# Allegro board dividers_v2.brd
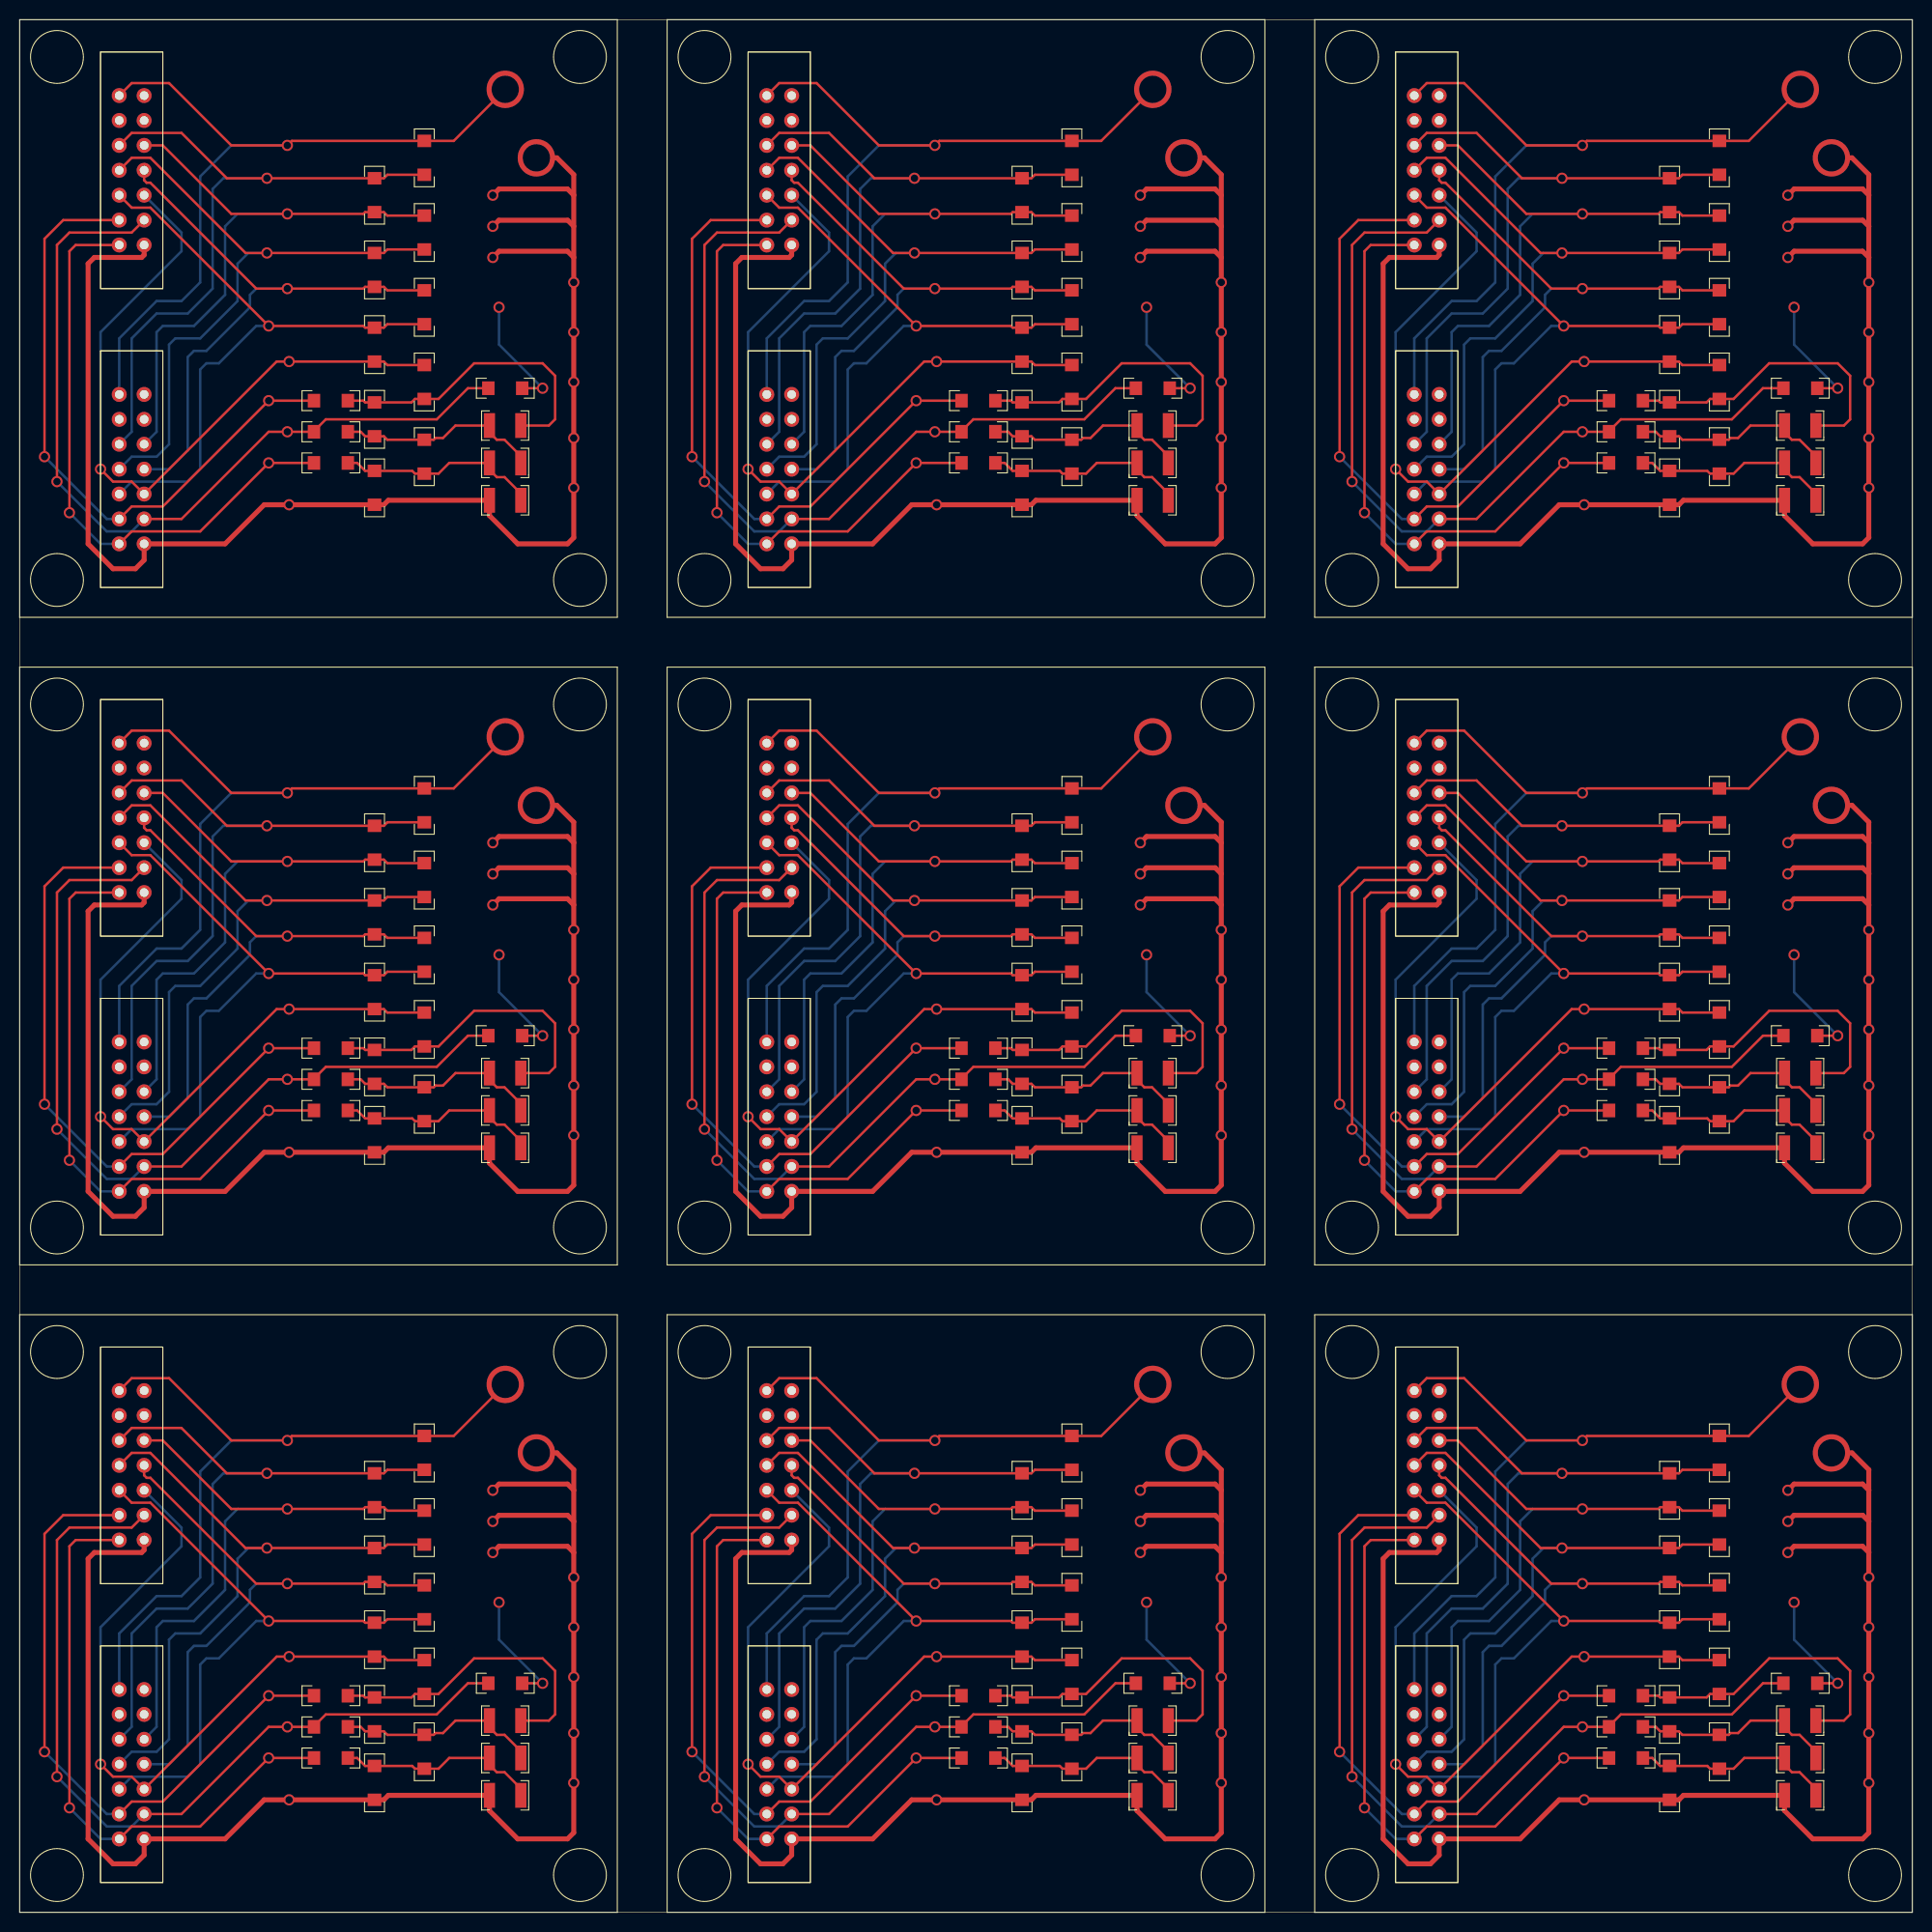
[diagram p0: board, top side]
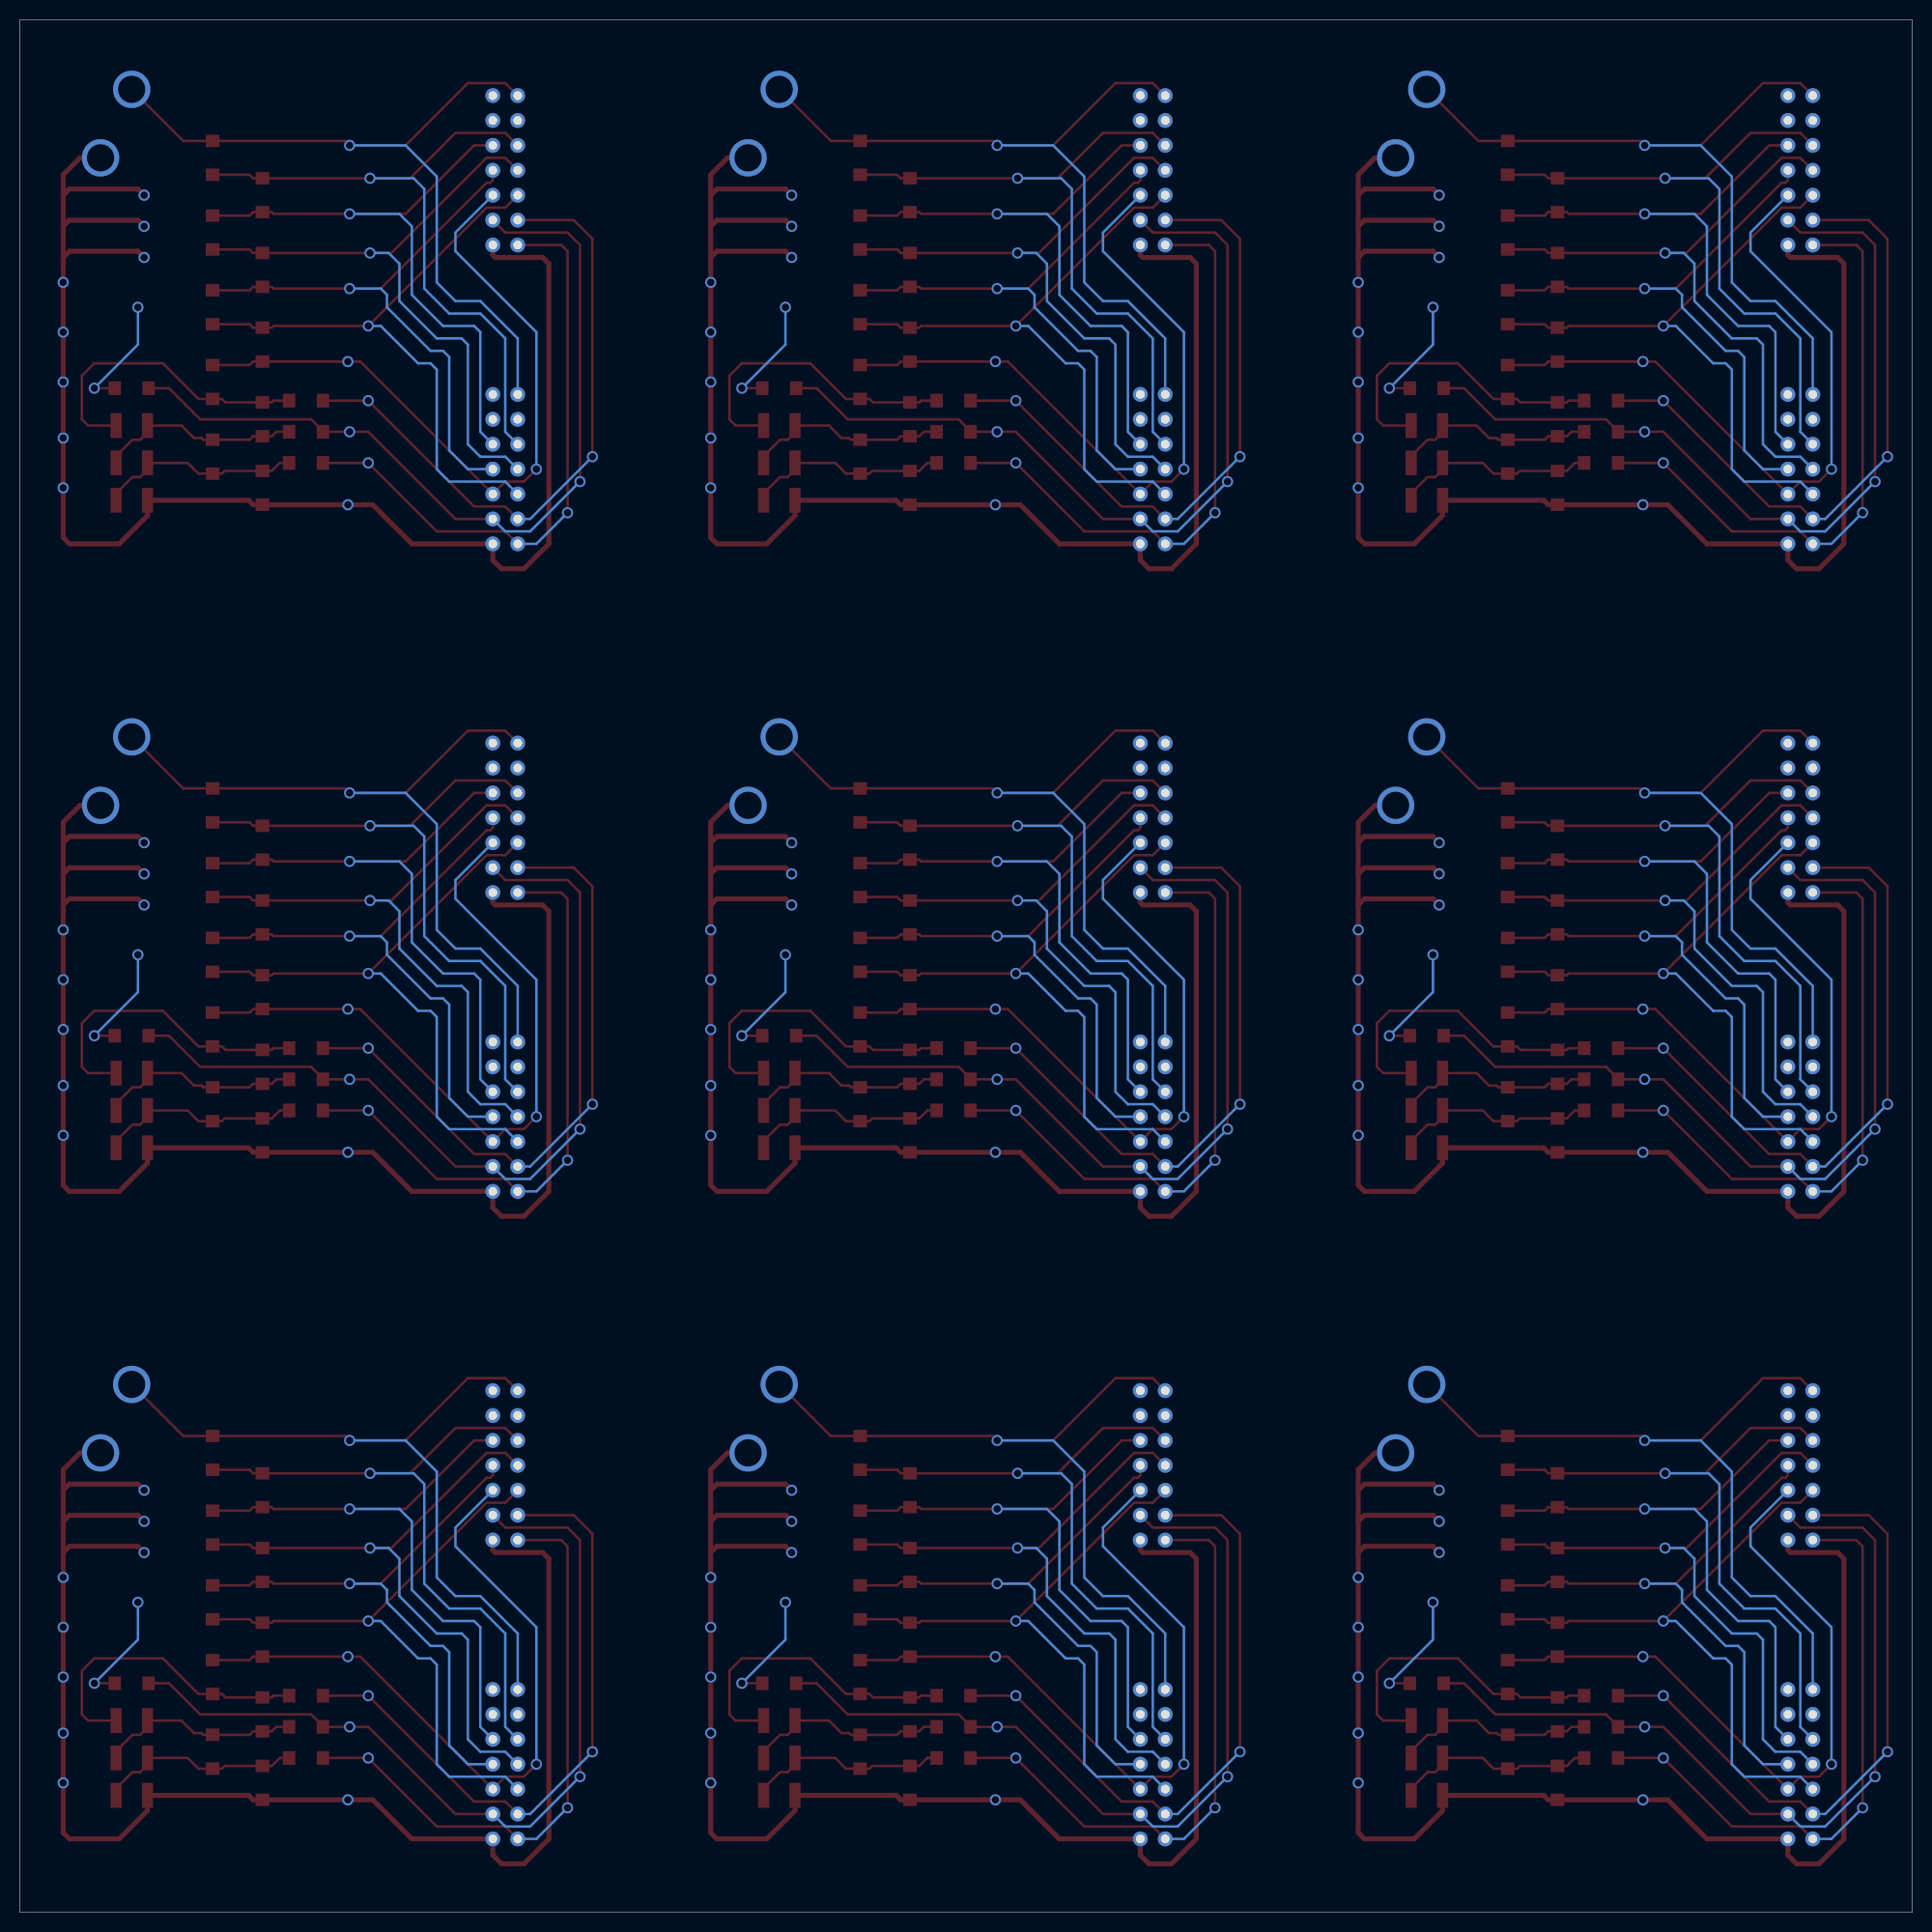
[diagram p1: board, bottom side, seen from below]

Outline 193.04 x 193.04 mm; copper layers: TOP, BOTTOM. Coordinates in mm from the lower left corner of the outline.
Outline path: 0,193.04 0,0 193.04,0 193.04,193.04 0,193.04

## Placement (name value [footprint] x y rotation side)
C1_1  0.022UF  [C1210]  49.53 19.56 180 top
C1_2  0.022UF  [C1210]  115.57 19.56 180 top
C1_3  0.022UF  [C1210]  181.61 19.56 180 top
C1_4  0.022UF  [C1210]  49.53 85.6 180 top
C1_5  0.022UF  [C1210]  115.57 85.6 180 top
C1_6  0.022UF  [C1210]  181.61 85.6 180 top
C1_7  0.022UF  [C1210]  49.53 151.64 180 top
C1_8  0.022UF  [C1210]  115.57 151.64 180 top
C1_9  0.022UF  [C1210]  181.61 151.64 180 top
C2_1  0.022UF  [C1210]  49.53 15.75 180 top
C2_2  0.022UF  [C1210]  115.57 15.75 180 top
C2_3  0.022UF  [C1210]  181.61 15.75 180 top
C2_4  0.022UF  [C1210]  49.53 81.79 180 top
C2_5  0.022UF  [C1210]  115.57 81.79 180 top
C2_6  0.022UF  [C1210]  181.61 81.79 180 top
C2_7  0.022UF  [C1210]  49.53 147.83 180 top
C2_8  0.022UF  [C1210]  115.57 147.83 180 top
C2_9  0.022UF  [C1210]  181.61 147.83 180 top
C3_1  0.022UF  [C1210]  49.53 11.94 180 top
C3_2  0.022UF  [C1210]  115.57 11.94 180 top
C3_3  0.022UF  [C1210]  181.61 11.94 180 top
C3_4  0.022UF  [C1210]  49.53 77.98 180 top
C3_5  0.022UF  [C1210]  115.57 77.98 180 top
C3_6  0.022UF  [C1210]  181.61 77.98 180 top
C3_7  0.022UF  [C1210]  49.53 144.02 180 top
C3_8  0.022UF  [C1210]  115.57 144.02 180 top
C3_9  0.022UF  [C1210]  181.61 144.02 180 top
J1_1  -  [HDR14]  11.43 45.59 0 top
J1_2  -  [HDR14]  77.47 45.59 0 top
J1_3  -  [HDR14]  143.51 45.59 0 top
J1_4  -  [HDR14]  11.43 111.63 0 top
J1_5  -  [HDR14]  77.47 111.63 0 top
J1_6  -  [HDR14]  143.51 111.63 0 top
J1_7  -  [HDR14]  11.43 177.67 0 top
J1_8  -  [HDR14]  77.47 177.67 0 top
J1_9  -  [HDR14]  143.51 177.67 0 top
J2_1  -  [HDR14]  11.43 15.11 0 top
J2_2  -  [HDR14]  77.47 15.11 0 top
J2_3  -  [HDR14]  143.51 15.11 0 top
J2_4  -  [HDR14]  11.43 81.15 0 top
J2_5  -  [HDR14]  77.47 81.15 0 top
J2_6  -  [HDR14]  143.51 81.15 0 top
J2_7  -  [HDR14]  11.43 147.19 0 top
J2_8  -  [HDR14]  77.47 147.19 0 top
J2_9  -  [HDR14]  143.51 147.19 0 top
NOREF  -  []  193.04 0 90 top
NOREF#2  -  []  0 193.04 0 top
R1_1  390K  [R1206]  41.27 46.86 270 top
R1_2  390K  [R1206]  107.31 46.86 270 top
R1_3  390K  [R1206]  173.35 46.86 270 top
R1_4  390K  [R1206]  41.27 112.9 270 top
R1_5  390K  [R1206]  107.31 112.9 270 top
R1_6  390K  [R1206]  173.35 112.9 270 top
R1_7  390K  [R1206]  41.27 178.94 270 top
R1_8  390K  [R1206]  107.31 178.94 270 top
R1_9  390K  [R1206]  173.35 178.94 270 top
R2_1  1.44M  [R1206]  36.2 43.05 270 top
R2_2  1.44M  [R1206]  102.23 43.05 270 top
R2_3  1.44M  [R1206]  168.28 43.05 270 top
R2_4  1.44M  [R1206]  36.2 109.09 270 top
R2_5  1.44M  [R1206]  102.23 109.09 270 top
R2_6  1.44M  [R1206]  168.28 109.09 270 top
R2_7  1.44M  [R1206]  36.2 175.13 270 top
R2_8  1.44M  [R1206]  102.23 175.13 270 top
R2_9  1.44M  [R1206]  168.28 175.13 270 top
R3_1  1M  [R1206]  49.53 23.37 180 top
R3_2  1M  [R1206]  115.57 23.37 180 top
R3_3  1M  [R1206]  181.61 23.37 180 top
R3_4  1M  [R1206]  49.53 89.41 180 top
R3_5  1M  [R1206]  115.57 89.41 180 top
R3_6  1M  [R1206]  181.61 89.41 180 top
R3_7  1M  [R1206]  49.53 155.45 180 top
R3_8  1M  [R1206]  115.57 155.45 180 top
R3_9  1M  [R1206]  181.61 155.45 180 top
R4_1  450K  [R1206]  41.27 39.24 270 top
R4_2  450K  [R1206]  107.31 39.24 270 top
R4_3  450K  [R1206]  173.35 39.24 270 top
R4_4  450K  [R1206]  41.27 105.28 270 top
R4_5  450K  [R1206]  107.31 105.28 270 top
R4_6  450K  [R1206]  173.35 105.28 270 top
R4_7  450K  [R1206]  41.27 171.32 270 top
R4_8  450K  [R1206]  107.31 171.32 270 top
R4_9  450K  [R1206]  173.35 171.32 270 top
R5_1  450K  [R1206]  36.2 35.43 270 top
R5_2  450K  [R1206]  102.23 35.43 270 top
R5_3  450K  [R1206]  168.28 35.43 270 top
R5_4  450K  [R1206]  36.2 101.47 270 top
R5_5  450K  [R1206]  102.23 101.47 270 top
R5_6  450K  [R1206]  168.28 101.47 270 top
R5_7  450K  [R1206]  36.2 167.51 270 top
R5_8  450K  [R1206]  102.23 167.51 270 top
R5_9  450K  [R1206]  168.28 167.51 270 top
R6_1  300K  [R1206]  41.27 31.62 270 top
R6_2  300K  [R1206]  107.31 31.62 270 top
R6_3  300K  [R1206]  173.35 31.62 270 top
R6_4  300K  [R1206]  41.27 97.66 270 top
R6_5  300K  [R1206]  107.31 97.66 270 top
R6_6  300K  [R1206]  173.35 97.66 270 top
R6_7  300K  [R1206]  41.27 163.7 270 top
R6_8  300K  [R1206]  107.31 163.7 270 top
R6_9  300K  [R1206]  173.35 163.7 270 top
R7_1  300K  [R1206]  36.2 27.81 270 top
R7_2  300K  [R1206]  102.23 27.81 270 top
R7_3  300K  [R1206]  168.28 27.81 270 top
R7_4  300K  [R1206]  36.2 93.85 270 top
R7_5  300K  [R1206]  102.23 93.85 270 top
R7_6  300K  [R1206]  168.28 93.85 270 top
R7_7  300K  [R1206]  36.2 159.89 270 top
R7_8  300K  [R1206]  102.23 159.89 270 top
R7_9  300K  [R1206]  168.28 159.89 270 top
R8_1  300K  [R1206]  41.27 24 270 top
R8_2  300K  [R1206]  107.31 24 270 top
R8_3  300K  [R1206]  173.35 24 270 top
R8_4  300K  [R1206]  41.27 90.04 270 top
R8_5  300K  [R1206]  107.31 90.04 270 top
R8_6  300K  [R1206]  173.35 90.04 270 top
R8_7  300K  [R1206]  41.27 156.08 270 top
R8_8  300K  [R1206]  107.31 156.08 270 top
R8_9  300K  [R1206]  173.35 156.08 270 top
R9_1  51  [R1206]  31.75 22.1 180 top
R9_2  51  [R1206]  97.79 22.1 180 top
R9_3  51  [R1206]  163.83 22.1 180 top
R9_4  51  [R1206]  31.75 88.14 180 top
R9_5  51  [R1206]  97.79 88.14 180 top
R9_6  51  [R1206]  163.83 88.14 180 top
R9_7  51  [R1206]  31.75 154.18 180 top
R9_8  51  [R1206]  97.79 154.18 180 top
R9_9  51  [R1206]  163.83 154.18 180 top
R10_1  300K  [R1206]  36.2 20.19 270 top
R10_2  300K  [R1206]  102.23 20.19 270 top
R10_3  300K  [R1206]  168.28 20.19 270 top
R10_4  300K  [R1206]  36.2 86.23 270 top
R10_5  300K  [R1206]  102.23 86.23 270 top
R10_6  300K  [R1206]  168.28 86.23 270 top
R10_7  300K  [R1206]  36.2 152.27 270 top
R10_8  300K  [R1206]  102.23 152.27 270 top
R10_9  300K  [R1206]  168.28 152.27 270 top
R11_1  51  [R1206]  31.75 18.92 180 top
R11_2  51  [R1206]  97.79 18.92 180 top
R11_3  51  [R1206]  163.83 18.92 180 top
R11_4  51  [R1206]  31.75 84.96 180 top
R11_5  51  [R1206]  97.79 84.96 180 top
R11_6  51  [R1206]  163.83 84.96 180 top
R11_7  51  [R1206]  31.75 151 180 top
R11_8  51  [R1206]  97.79 151 180 top
R11_9  51  [R1206]  163.83 151 180 top
R12_1  300K  [R1206]  41.27 16.38 270 top
R12_2  300K  [R1206]  107.31 16.38 270 top
R12_3  300K  [R1206]  173.35 16.38 270 top
R12_4  300K  [R1206]  41.27 82.42 270 top
R12_5  300K  [R1206]  107.31 82.42 270 top
R12_6  300K  [R1206]  173.35 82.42 270 top
R12_7  300K  [R1206]  41.27 148.46 270 top
R12_8  300K  [R1206]  107.31 148.46 270 top
R12_9  300K  [R1206]  173.35 148.46 270 top
R13_1  51  [R1206]  31.75 15.75 180 top
R13_2  51  [R1206]  97.79 15.75 180 top
R13_3  51  [R1206]  163.83 15.75 180 top
R13_4  51  [R1206]  31.75 81.79 180 top
R13_5  51  [R1206]  97.79 81.79 180 top
R13_6  51  [R1206]  163.83 81.79 180 top
R13_7  51  [R1206]  31.75 147.83 180 top
R13_8  51  [R1206]  97.79 147.83 180 top
R13_9  51  [R1206]  163.83 147.83 180 top
R14_1  300K  [R1206]  36.2 13.21 270 top
R14_2  300K  [R1206]  102.23 13.21 270 top
R14_3  300K  [R1206]  168.28 13.21 270 top
R14_4  300K  [R1206]  36.2 79.25 270 top
R14_5  300K  [R1206]  102.23 79.25 270 top
R14_6  300K  [R1206]  168.28 79.25 270 top
R14_7  300K  [R1206]  36.2 145.29 270 top
R14_8  300K  [R1206]  102.23 145.29 270 top
R14_9  300K  [R1206]  168.28 145.29 270 top

## Library data of the parts
C1_1-C1_9 C2_1-C2_9 C3_1-C3_9 = CSMD1210: alternate symbols: (C1206); part number: CSMD1210-0.022UF,20%,1210,2KV
J1_1-J1_9 J2_1-J2_9 = CONN14
R1_1-R1_9 = RSMD1206: part number: RSMD1206-390K,5%,1206
R2_1-R2_9 = RSMD1206: part number: RSMD1206-1.44M,5%,1206
R3_1-R3_9 = RSMD1206: part number: RSMD1206-1M,5%,1206
R4_1-R4_9 R5_1-R5_9 = RSMD1206: part number: RSMD1206-450K,5%,1206
R6_1-R6_9 R7_1-R7_9 R8_1-R8_9 R10_1-R10_9 R12_1-R12_9 R14_1-R14_9 = RSMD1206: part number: RSMD1206-300K,5%,1206
R9_1-R9_9 R11_1-R11_9 R13_1-R13_9 = RSMD1206: part number: RSMD1206-51,5%,1206

## Footprints (pads in the part's own frame, mm; a bottom-side part is the same pattern mirrored in y, then rotated)
C1210
  rect 1.143x2.54 smd: 1(-1.587,0) 2(1.612,0)
HDR14
  round 1.524 hole 0.889: 1(-1.27,7.62) 2(1.27,7.62) 3(-1.27,5.08) 4(1.27,5.08) 5(-1.27,2.54) 6(1.27,2.54) 7(-1.27,0) 8(1.27,0) 9(-1.27,-2.54) 10(1.27,-2.54) 11(-1.27,-5.08) 12(1.27,-5.08) 13(-1.27,-7.62) 14(1.27,-7.62)
R1206
  rect 1.27x1.397 smd: 1(-1.727,0) 2(1.727,0)

## Nets
GND_1: C3_1.2(B<0>) J1_1.14 J2_1.14 R14_1.2(B<0>)
GND_2: C3_2.2(B<0>) J1_2.14 J2_2.14 R14_2.2(B<0>)
GND_3: C3_3.2(B<0>) J1_3.14 J2_3.14 R14_3.2(B<0>)
GND_4: C3_4.2(B<0>) J1_4.14 J2_4.14 R14_4.2(B<0>)
GND_5: C3_5.2(B<0>) J1_5.14 J2_5.14 R14_5.2(B<0>)
GND_6: C3_6.2(B<0>) J1_6.14 J2_6.14 R14_6.2(B<0>)
GND_7: C3_7.2(B<0>) J1_7.14 J2_7.14 R14_7.2(B<0>)
GND_8: C3_8.2(B<0>) J1_8.14 J2_8.14 R14_8.2(B<0>)
GND_9: C3_9.2(B<0>) J1_9.14 J2_9.14 R14_9.2(B<0>)
-HV_1: J1_1.1 J2_1.1 R1_1.1(A<0>)
-HV_2: J1_2.1 J2_2.1 R1_2.1(A<0>)
-HV_3: J1_3.1 J2_3.1 R1_3.1(A<0>)
-HV_4: J1_4.1 J2_4.1 R1_4.1(A<0>)
-HV_5: J1_5.1 J2_5.1 R1_5.1(A<0>)
-HV_6: J1_6.1 J2_6.1 R1_6.1(A<0>)
-HV_7: J1_7.1 J2_7.1 R1_7.1(A<0>)
-HV_8: J1_8.1 J2_8.1 R1_8.1(A<0>)
-HV_9: J1_9.1 J2_9.1 R1_9.1(A<0>)
ACC_1: R3_1.1(A<0>)
ACC_2: R3_2.1(A<0>)
ACC_3: R3_3.1(A<0>)
ACC_4: R3_4.1(A<0>)
ACC_5: R3_5.1(A<0>)
ACC_6: R3_6.1(A<0>)
ACC_7: R3_7.1(A<0>)
ACC_8: R3_8.1(A<0>)
ACC_9: R3_9.1(A<0>)
UNNAMED_1_CONN14_I18_5_1: J1_1.5 J2_1.5 R1_1.2(B<0>) R2_1.1(A<0>)
UNNAMED_1_CONN14_I18_5_2: J1_2.5 J2_2.5 R1_2.2(B<0>) R2_2.1(A<0>)
UNNAMED_1_CONN14_I18_5_3: J1_3.5 J2_3.5 R1_3.2(B<0>) R2_3.1(A<0>)
UNNAMED_1_CONN14_I18_5_4: J1_4.5 J2_4.5 R1_4.2(B<0>) R2_4.1(A<0>)
UNNAMED_1_CONN14_I18_5_5: J1_5.5 J2_5.5 R1_5.2(B<0>) R2_5.1(A<0>)
UNNAMED_1_CONN14_I18_5_6: J1_6.5 J2_6.5 R1_6.2(B<0>) R2_6.1(A<0>)
UNNAMED_1_CONN14_I18_5_7: J1_7.5 J2_7.5 R1_7.2(B<0>) R2_7.1(A<0>)
UNNAMED_1_CONN14_I18_5_8: J1_8.5 J2_8.5 R1_8.2(B<0>) R2_8.1(A<0>)
UNNAMED_1_CONN14_I18_5_9: J1_9.5 J2_9.5 R1_9.2(B<0>) R2_9.1(A<0>)
UNNAMED_1_CONN14_I18_6_1: J1_1.6 J2_1.6 R2_1.2(B<0>) R4_1.1(A<0>)
UNNAMED_1_CONN14_I18_6_2: J1_2.6 J2_2.6 R2_2.2(B<0>) R4_2.1(A<0>)
UNNAMED_1_CONN14_I18_6_3: J1_3.6 J2_3.6 R2_3.2(B<0>) R4_3.1(A<0>)
UNNAMED_1_CONN14_I18_6_4: J1_4.6 J2_4.6 R2_4.2(B<0>) R4_4.1(A<0>)
UNNAMED_1_CONN14_I18_6_5: J1_5.6 J2_5.6 R2_5.2(B<0>) R4_5.1(A<0>)
UNNAMED_1_CONN14_I18_6_6: J1_6.6 J2_6.6 R2_6.2(B<0>) R4_6.1(A<0>)
UNNAMED_1_CONN14_I18_6_7: J1_7.6 J2_7.6 R2_7.2(B<0>) R4_7.1(A<0>)
UNNAMED_1_CONN14_I18_6_8: J1_8.6 J2_8.6 R2_8.2(B<0>) R4_8.1(A<0>)
UNNAMED_1_CONN14_I18_6_9: J1_9.6 J2_9.6 R2_9.2(B<0>) R4_9.1(A<0>)
UNNAMED_1_CONN14_I18_7_1: J1_1.7 J2_1.7 R4_1.2(B<0>) R5_1.1(A<0>)
UNNAMED_1_CONN14_I18_7_2: J1_2.7 J2_2.7 R4_2.2(B<0>) R5_2.1(A<0>)
UNNAMED_1_CONN14_I18_7_3: J1_3.7 J2_3.7 R4_3.2(B<0>) R5_3.1(A<0>)
UNNAMED_1_CONN14_I18_7_4: J1_4.7 J2_4.7 R4_4.2(B<0>) R5_4.1(A<0>)
UNNAMED_1_CONN14_I18_7_5: J1_5.7 J2_5.7 R4_5.2(B<0>) R5_5.1(A<0>)
UNNAMED_1_CONN14_I18_7_6: J1_6.7 J2_6.7 R4_6.2(B<0>) R5_6.1(A<0>)
UNNAMED_1_CONN14_I18_7_7: J1_7.7 J2_7.7 R4_7.2(B<0>) R5_7.1(A<0>)
UNNAMED_1_CONN14_I18_7_8: J1_8.7 J2_8.7 R4_8.2(B<0>) R5_8.1(A<0>)
UNNAMED_1_CONN14_I18_7_9: J1_9.7 J2_9.7 R4_9.2(B<0>) R5_9.1(A<0>)
UNNAMED_1_CONN14_I18_8_1: J1_1.8 J2_1.8 R5_1.2(B<0>) R6_1.1(A<0>)
UNNAMED_1_CONN14_I18_8_2: J1_2.8 J2_2.8 R5_2.2(B<0>) R6_2.1(A<0>)
UNNAMED_1_CONN14_I18_8_3: J1_3.8 J2_3.8 R5_3.2(B<0>) R6_3.1(A<0>)
UNNAMED_1_CONN14_I18_8_4: J1_4.8 J2_4.8 R5_4.2(B<0>) R6_4.1(A<0>)
UNNAMED_1_CONN14_I18_8_5: J1_5.8 J2_5.8 R5_5.2(B<0>) R6_5.1(A<0>)
UNNAMED_1_CONN14_I18_8_6: J1_6.8 J2_6.8 R5_6.2(B<0>) R6_6.1(A<0>)
UNNAMED_1_CONN14_I18_8_7: J1_7.8 J2_7.8 R5_7.2(B<0>) R6_7.1(A<0>)
UNNAMED_1_CONN14_I18_8_8: J1_8.8 J2_8.8 R5_8.2(B<0>) R6_8.1(A<0>)
UNNAMED_1_CONN14_I18_8_9: J1_9.8 J2_9.8 R5_9.2(B<0>) R6_9.1(A<0>)
UNNAMED_1_CONN14_I18_9_1: J1_1.9 J2_1.9 R6_1.2(B<0>) R7_1.1(A<0>)
UNNAMED_1_CONN14_I18_9_2: J1_2.9 J2_2.9 R6_2.2(B<0>) R7_2.1(A<0>)
UNNAMED_1_CONN14_I18_9_3: J1_3.9 J2_3.9 R6_3.2(B<0>) R7_3.1(A<0>)
UNNAMED_1_CONN14_I18_9_4: J1_4.9 J2_4.9 R6_4.2(B<0>) R7_4.1(A<0>)
UNNAMED_1_CONN14_I18_9_5: J1_5.9 J2_5.9 R6_5.2(B<0>) R7_5.1(A<0>)
UNNAMED_1_CONN14_I18_9_6: J1_6.9 J2_6.9 R6_6.2(B<0>) R7_6.1(A<0>)
UNNAMED_1_CONN14_I18_9_7: J1_7.9 J2_7.9 R6_7.2(B<0>) R7_7.1(A<0>)
UNNAMED_1_CONN14_I18_9_8: J1_8.9 J2_8.9 R6_8.2(B<0>) R7_8.1(A<0>)
UNNAMED_1_CONN14_I18_9_9: J1_9.9 J2_9.9 R6_9.2(B<0>) R7_9.1(A<0>)
UNNAMED_1_CONN14_I18_10_1: J1_1.10 J2_1.10 R7_1.2(B<0>) R8_1.1(A<0>)
UNNAMED_1_CONN14_I18_10_2: J1_2.10 J2_2.10 R7_2.2(B<0>) R8_2.1(A<0>)
UNNAMED_1_CONN14_I18_10_3: J1_3.10 J2_3.10 R7_3.2(B<0>) R8_3.1(A<0>)
UNNAMED_1_CONN14_I18_10_4: J1_4.10 J2_4.10 R7_4.2(B<0>) R8_4.1(A<0>)
UNNAMED_1_CONN14_I18_10_5: J1_5.10 J2_5.10 R7_5.2(B<0>) R8_5.1(A<0>)
UNNAMED_1_CONN14_I18_10_6: J1_6.10 J2_6.10 R7_6.2(B<0>) R8_6.1(A<0>)
UNNAMED_1_CONN14_I18_10_7: J1_7.10 J2_7.10 R7_7.2(B<0>) R8_7.1(A<0>)
UNNAMED_1_CONN14_I18_10_8: J1_8.10 J2_8.10 R7_8.2(B<0>) R8_8.1(A<0>)
UNNAMED_1_CONN14_I18_10_9: J1_9.10 J2_9.10 R7_9.2(B<0>) R8_9.1(A<0>)
UNNAMED_1_CONN14_I18_11_1: J1_1.11 J2_1.11 R9_1.2(B<0>)
UNNAMED_1_CONN14_I18_11_2: J1_2.11 J2_2.11 R9_2.2(B<0>)
UNNAMED_1_CONN14_I18_11_3: J1_3.11 J2_3.11 R9_3.2(B<0>)
UNNAMED_1_CONN14_I18_11_4: J1_4.11 J2_4.11 R9_4.2(B<0>)
UNNAMED_1_CONN14_I18_11_5: J1_5.11 J2_5.11 R9_5.2(B<0>)
UNNAMED_1_CONN14_I18_11_6: J1_6.11 J2_6.11 R9_6.2(B<0>)
UNNAMED_1_CONN14_I18_11_7: J1_7.11 J2_7.11 R9_7.2(B<0>)
UNNAMED_1_CONN14_I18_11_8: J1_8.11 J2_8.11 R9_8.2(B<0>)
UNNAMED_1_CONN14_I18_11_9: J1_9.11 J2_9.11 R9_9.2(B<0>)
UNNAMED_1_CONN14_I18_12_1: J1_1.12 J2_1.12 R3_1.2(B<0>) R11_1.2(B<0>)
UNNAMED_1_CONN14_I18_12_2: J1_2.12 J2_2.12 R3_2.2(B<0>) R11_2.2(B<0>)
UNNAMED_1_CONN14_I18_12_3: J1_3.12 J2_3.12 R3_3.2(B<0>) R11_3.2(B<0>)
UNNAMED_1_CONN14_I18_12_4: J1_4.12 J2_4.12 R3_4.2(B<0>) R11_4.2(B<0>)
UNNAMED_1_CONN14_I18_12_5: J1_5.12 J2_5.12 R3_5.2(B<0>) R11_5.2(B<0>)
UNNAMED_1_CONN14_I18_12_6: J1_6.12 J2_6.12 R3_6.2(B<0>) R11_6.2(B<0>)
UNNAMED_1_CONN14_I18_12_7: J1_7.12 J2_7.12 R3_7.2(B<0>) R11_7.2(B<0>)
UNNAMED_1_CONN14_I18_12_8: J1_8.12 J2_8.12 R3_8.2(B<0>) R11_8.2(B<0>)
UNNAMED_1_CONN14_I18_12_9: J1_9.12 J2_9.12 R3_9.2(B<0>) R11_9.2(B<0>)
UNNAMED_1_CONN14_I18_13_1: J1_1.13 J2_1.13 R13_1.2(B<0>)
UNNAMED_1_CONN14_I18_13_2: J1_2.13 J2_2.13 R13_2.2(B<0>)
UNNAMED_1_CONN14_I18_13_3: J1_3.13 J2_3.13 R13_3.2(B<0>)
UNNAMED_1_CONN14_I18_13_4: J1_4.13 J2_4.13 R13_4.2(B<0>)
UNNAMED_1_CONN14_I18_13_5: J1_5.13 J2_5.13 R13_5.2(B<0>)
UNNAMED_1_CONN14_I18_13_6: J1_6.13 J2_6.13 R13_6.2(B<0>)
UNNAMED_1_CONN14_I18_13_7: J1_7.13 J2_7.13 R13_7.2(B<0>)
UNNAMED_1_CONN14_I18_13_8: J1_8.13 J2_8.13 R13_8.2(B<0>)
UNNAMED_1_CONN14_I18_13_9: J1_9.13 J2_9.13 R13_9.2(B<0>)
UNNAMED_1_CSMD1210_I15_A_1: C1_1.1(A<0>) R8_1.2(B<0>) R9_1.1(A<0>) R10_1.1(A<0>)
UNNAMED_1_CSMD1210_I15_A_2: C1_2.1(A<0>) R8_2.2(B<0>) R9_2.1(A<0>) R10_2.1(A<0>)
UNNAMED_1_CSMD1210_I15_A_3: C1_3.1(A<0>) R8_3.2(B<0>) R9_3.1(A<0>) R10_3.1(A<0>)
UNNAMED_1_CSMD1210_I15_A_4: C1_4.1(A<0>) R8_4.2(B<0>) R9_4.1(A<0>) R10_4.1(A<0>)
UNNAMED_1_CSMD1210_I15_A_5: C1_5.1(A<0>) R8_5.2(B<0>) R9_5.1(A<0>) R10_5.1(A<0>)
UNNAMED_1_CSMD1210_I15_A_6: C1_6.1(A<0>) R8_6.2(B<0>) R9_6.1(A<0>) R10_6.1(A<0>)
UNNAMED_1_CSMD1210_I15_A_7: C1_7.1(A<0>) R8_7.2(B<0>) R9_7.1(A<0>) R10_7.1(A<0>)
UNNAMED_1_CSMD1210_I15_A_8: C1_8.1(A<0>) R8_8.2(B<0>) R9_8.1(A<0>) R10_8.1(A<0>)
UNNAMED_1_CSMD1210_I15_A_9: C1_9.1(A<0>) R8_9.2(B<0>) R9_9.1(A<0>) R10_9.1(A<0>)
UNNAMED_1_CSMD1210_I15_B_1: C1_1.2(B<0>) C2_1.1(A<0>) R10_1.2(B<0>) R11_1.1(A<0>) R12_1.1(A<0>)
UNNAMED_1_CSMD1210_I15_B_2: C1_2.2(B<0>) C2_2.1(A<0>) R10_2.2(B<0>) R11_2.1(A<0>) R12_2.1(A<0>)
UNNAMED_1_CSMD1210_I15_B_3: C1_3.2(B<0>) C2_3.1(A<0>) R10_3.2(B<0>) R11_3.1(A<0>) R12_3.1(A<0>)
UNNAMED_1_CSMD1210_I15_B_4: C1_4.2(B<0>) C2_4.1(A<0>) R10_4.2(B<0>) R11_4.1(A<0>) R12_4.1(A<0>)
UNNAMED_1_CSMD1210_I15_B_5: C1_5.2(B<0>) C2_5.1(A<0>) R10_5.2(B<0>) R11_5.1(A<0>) R12_5.1(A<0>)
UNNAMED_1_CSMD1210_I15_B_6: C1_6.2(B<0>) C2_6.1(A<0>) R10_6.2(B<0>) R11_6.1(A<0>) R12_6.1(A<0>)
UNNAMED_1_CSMD1210_I15_B_7: C1_7.2(B<0>) C2_7.1(A<0>) R10_7.2(B<0>) R11_7.1(A<0>) R12_7.1(A<0>)
UNNAMED_1_CSMD1210_I15_B_8: C1_8.2(B<0>) C2_8.1(A<0>) R10_8.2(B<0>) R11_8.1(A<0>) R12_8.1(A<0>)
UNNAMED_1_CSMD1210_I15_B_9: C1_9.2(B<0>) C2_9.1(A<0>) R10_9.2(B<0>) R11_9.1(A<0>) R12_9.1(A<0>)
UNNAMED_1_CSMD1210_I16_A_1: C2_1.2(B<0>) C3_1.1(A<0>) R12_1.2(B<0>) R13_1.1(A<0>) R14_1.1(A<0>)
UNNAMED_1_CSMD1210_I16_A_2: C2_2.2(B<0>) C3_2.1(A<0>) R12_2.2(B<0>) R13_2.1(A<0>) R14_2.1(A<0>)
UNNAMED_1_CSMD1210_I16_A_3: C2_3.2(B<0>) C3_3.1(A<0>) R12_3.2(B<0>) R13_3.1(A<0>) R14_3.1(A<0>)
UNNAMED_1_CSMD1210_I16_A_4: C2_4.2(B<0>) C3_4.1(A<0>) R12_4.2(B<0>) R13_4.1(A<0>) R14_4.1(A<0>)
UNNAMED_1_CSMD1210_I16_A_5: C2_5.2(B<0>) C3_5.1(A<0>) R12_5.2(B<0>) R13_5.1(A<0>) R14_5.1(A<0>)
UNNAMED_1_CSMD1210_I16_A_6: C2_6.2(B<0>) C3_6.1(A<0>) R12_6.2(B<0>) R13_6.1(A<0>) R14_6.1(A<0>)
UNNAMED_1_CSMD1210_I16_A_7: C2_7.2(B<0>) C3_7.1(A<0>) R12_7.2(B<0>) R13_7.1(A<0>) R14_7.1(A<0>)
UNNAMED_1_CSMD1210_I16_A_8: C2_8.2(B<0>) C3_8.1(A<0>) R12_8.2(B<0>) R13_8.1(A<0>) R14_8.1(A<0>)
UNNAMED_1_CSMD1210_I16_A_9: C2_9.2(B<0>) C3_9.1(A<0>) R12_9.2(B<0>) R13_9.1(A<0>) R14_9.1(A<0>)

Pads without a net: J1_1 2 3 4; J1_2 2 3 4; J1_3 2 3 4; J1_4 2 3 4; J1_5 2 3 4; J1_6 2 3 4; J1_7 2 3 4; J1_8 2 3 4; J1_9 2 3 4; J2_1 2 3 4; J2_2 2 3 4; J2_3 2 3 4; J2_4 2 3 4; J2_5 2 3 4; J2_6 2 3 4; J2_7 2 3 4; J2_8 2 3 4; J2_9 2 3 4

## Via types
v1: diameter 1.143, hole 0.762, TOP to BOTTOM, 225 vias
v2: diameter 3.81, hole 2.794, TOP to BOTTOM, 18 vias

## Routing (per net, layer and track width the routed paths; a pad name or vN(x,y) marks a point on that pad's centre or on a via; arc(x,y) is an arc through that point)
GND_1: length 161
  TOP w0.508: 12.7,37.97 12.7,36.96 12.45,36.7 7.62,36.7 6.99,36.07 6.99,7.49 9.53,4.95 11.81,4.95 12.7,5.84 J2_1.14 20.95,7.49 24.94,11.48 v1(27.48,11.48) R14_1.2 37.15,11.48 37.6,11.94 C3_1.2 47.92,10.38 50.8,7.49 55.88,7.49 56.52,8.13 v1(56.52,13.21) v1(56.52,18.29) v1(56.52,24) v1(56.52,29.08) v1(56.52,34.16) 56.52,36.7 ; 56.52,36.7 56.52,39.88 ; 56.52,36.7 55.88,37.34 48.9,37.34 v1(48.26,36.7) ; v1(48.26,43.05) 48.9,43.69 55.88,43.69 56.52,43.05 ; 56.52,39.88 56.52,43.05 ; 56.52,39.88 55.9,40.5 48.88,40.5 v1(48.26,39.88) ; 56.52,43.05 56.52,45.15 54.8,46.86 v2(52.7,46.86)
GND_2: length 161
  TOP w0.508: 122.56,36.7 122.56,39.88 ; 122.56,36.7 v1(122.56,34.16) v1(122.56,29.08) v1(122.56,24) v1(122.56,18.29) v1(122.56,13.21) 122.56,8.13 121.92,7.49 116.84,7.49 113.96,10.38 C3_2.2 103.64,11.94 103.19,11.48 R14_2.2 v1(93.52,11.48) 90.98,11.48 87,7.49 J2_2.14 78.74,5.84 77.85,4.95 75.56,4.95 73.03,7.49 73.03,36.07 73.66,36.7 78.49,36.7 78.74,36.96 78.74,37.97 ; 122.56,36.7 121.92,37.34 114.94,37.34 v1(114.3,36.7) ; 122.56,39.88 121.94,40.5 114.92,40.5 v1(114.3,39.88) ; 122.56,39.88 122.56,43.05 ; 122.56,43.05 122.56,45.15 120.84,46.86 v2(118.75,46.86) ; 122.56,43.05 121.92,43.69 114.94,43.69 v1(114.3,43.05)
GND_3: length 161
  TOP w0.508: v1(180.34,43.05) 180.97,43.69 187.96,43.69 188.59,43.05 ; 188.59,43.05 188.59,45.15 186.88,46.86 v2(184.78,46.86) ; 188.59,43.05 188.59,39.88 ; 188.59,39.88 187.98,40.5 180.96,40.5 v1(180.34,39.88) ; 188.59,39.88 188.59,36.7 ; 144.78,37.97 144.78,36.96 144.53,36.7 139.7,36.7 139.06,36.07 139.06,7.49 141.6,4.95 143.89,4.95 144.78,5.84 J2_3.14 153.03,7.49 157.02,11.48 v1(159.56,11.48) R14_3.2 169.23,11.48 169.68,11.94 C3_3.2 180,10.38 182.88,7.49 187.96,7.49 188.59,8.13 v1(188.59,13.21) v1(188.59,18.29) v1(188.59,24) v1(188.59,29.08) v1(188.59,34.16) 188.59,36.7 ; 188.59,36.7 187.96,37.34 180.97,37.34 v1(180.34,36.7)
GND_4: length 161
  TOP w0.508: 56.52,105.92 56.52,109.09 ; 56.52,105.92 55.9,106.54 48.88,106.54 v1(48.26,105.92) ; 56.52,105.92 56.52,102.74 ; 56.52,109.09 55.88,109.73 48.9,109.73 v1(48.26,109.09) ; 56.52,109.09 56.52,111.19 54.8,112.9 v2(52.7,112.9) ; J1_4.14 12.7,103 12.45,102.74 7.62,102.74 6.99,102.11 6.99,73.53 9.53,70.99 11.81,70.99 12.7,71.88 J2_4.14 20.95,73.53 24.94,77.52 v1(27.48,77.52) R14_4.2 37.15,77.52 37.6,77.98 C3_4.2 47.92,76.42 50.8,73.53 55.88,73.53 56.52,74.17 v1(56.52,79.25) v1(56.52,84.33) v1(56.52,90.04) v1(56.52,95.12) v1(56.52,100.2) 56.52,102.74 ; 56.52,102.74 55.88,103.38 48.9,103.38 v1(48.26,102.74)
GND_5: length 161
  TOP w0.508: v2(118.75,112.9) 120.84,112.9 122.56,111.19 122.56,109.09 ; J1_5.14 78.74,103 78.49,102.74 73.66,102.74 73.03,102.11 73.03,73.53 75.56,70.99 77.85,70.99 78.74,71.88 J2_5.14 87,73.53 90.98,77.52 v1(93.52,77.52) R14_5.2 103.19,77.52 103.64,77.98 C3_5.2 113.96,76.42 116.84,73.53 121.92,73.53 122.56,74.17 v1(122.56,79.25) v1(122.56,84.33) v1(122.56,90.04) v1(122.56,95.12) v1(122.56,100.2) 122.56,102.74 ; v1(114.3,109.09) 114.94,109.73 121.92,109.73 122.56,109.09 ; 122.56,105.92 121.94,106.54 114.92,106.54 v1(114.3,105.92) ; 122.56,105.92 122.56,102.74 ; 122.56,105.92 122.56,109.09 ; 122.56,102.74 121.92,103.38 114.94,103.38 v1(114.3,102.74)
GND_6: length 161
  TOP w0.508: 188.59,109.09 187.96,109.73 180.97,109.73 v1(180.34,109.09) ; 188.59,109.09 188.59,111.19 186.88,112.9 v2(184.78,112.9) ; 188.59,109.09 188.59,105.92 ; 188.59,105.92 188.59,102.74 ; 188.59,105.92 187.98,106.54 180.96,106.54 v1(180.34,105.92) ; J1_6.14 144.78,103 144.53,102.74 139.7,102.74 139.06,102.11 139.06,73.53 141.6,70.99 143.89,70.99 144.78,71.88 J2_6.14 153.03,73.53 157.02,77.52 v1(159.56,77.52) R14_6.2 169.23,77.52 169.68,77.98 C3_6.2 180,76.42 182.88,73.53 187.96,73.53 188.59,74.17 v1(188.59,79.25) v1(188.59,84.33) v1(188.59,90.04) v1(188.59,95.12) v1(188.59,100.2) 188.59,102.74 ; 188.59,102.74 187.96,103.38 180.97,103.38 v1(180.34,102.74)
GND_7: length 161
  TOP w0.508: v1(48.26,175.13) 48.9,175.77 55.88,175.77 56.52,175.13 ; 56.52,168.78 v1(56.52,166.24) v1(56.52,161.16) v1(56.52,156.08) v1(56.52,150.37) v1(56.52,145.29) 56.52,140.21 55.88,139.57 50.8,139.57 47.92,142.46 C3_7.2 37.6,144.02 37.15,143.56 R14_7.2 v1(27.48,143.56) 24.94,143.56 20.95,139.57 J2_7.14 12.7,137.92 11.81,137.03 9.53,137.03 6.99,139.57 6.99,168.15 7.62,168.78 12.45,168.78 12.7,169.04 J1_7.14 ; 56.52,168.78 56.52,171.96 ; 56.52,168.78 55.88,169.42 48.9,169.42 v1(48.26,168.78) ; 56.52,171.96 55.9,172.58 48.88,172.58 v1(48.26,171.96) ; 56.52,171.96 56.52,175.13 ; 56.52,175.13 56.52,177.23 54.8,178.94 v2(52.7,178.94)
GND_8: length 161
  TOP w0.508: v1(114.3,168.78) 114.94,169.42 121.92,169.42 122.56,168.78 ; 122.56,175.13 121.92,175.77 114.94,175.77 v1(114.3,175.13) ; 122.56,175.13 122.56,177.23 120.84,178.94 v2(118.75,178.94) ; 122.56,175.13 122.56,171.96 ; 122.56,168.78 122.56,171.96 ; 122.56,168.78 v1(122.56,166.24) v1(122.56,161.16) v1(122.56,156.08) v1(122.56,150.37) v1(122.56,145.29) 122.56,140.21 121.92,139.57 116.84,139.57 113.96,142.46 C3_8.2 103.64,144.02 103.19,143.56 R14_8.2 v1(93.52,143.56) 90.98,143.56 87,139.57 J2_8.14 78.74,137.92 77.85,137.03 75.56,137.03 73.03,139.57 73.03,168.15 73.66,168.78 78.49,168.78 78.74,169.04 J1_8.14 ; 122.56,171.96 121.94,172.58 114.92,172.58 v1(114.3,171.96)
GND_9: length 161
  TOP w0.508: 188.59,175.13 188.59,177.23 186.88,178.94 v2(184.78,178.94) ; 188.59,175.13 188.59,171.96 ; 188.59,175.13 187.96,175.77 180.97,175.77 v1(180.34,175.13) ; v1(180.34,168.78) 180.97,169.42 187.96,169.42 188.59,168.78 ; 188.59,168.78 v1(188.59,166.24) v1(188.59,161.16) v1(188.59,156.08) v1(188.59,150.37) v1(188.59,145.29) 188.59,140.21 187.96,139.57 182.88,139.57 180,142.46 C3_9.2 169.68,144.02 169.23,143.56 R14_9.2 v1(159.56,143.56) 157.02,143.56 153.03,139.57 J2_9.14 144.78,137.92 143.89,137.03 141.6,137.03 139.06,139.57 139.06,168.15 139.7,168.78 144.53,168.78 144.78,169.04 J1_9.14 ; 188.59,168.78 188.59,171.96 ; 188.59,171.96 187.98,172.58 180.96,172.58 v1(180.34,171.96)
-HV_1: length 82.2
  TOP w0.254: v2(49.53,53.85) 44.27,48.59 R1_1.1 27.76,48.59 v1(27.3,48.13) 21.59,48.13 15.24,54.48 11.43,54.48 J1_1.1
  BOTTOM w0.254: v1(27.3,48.13) 21.59,48.13 18.41,44.96 18.41,34.16 16.51,32.26 13.97,32.26 10.16,28.45 J2_1.1
-HV_2: length 82.2
  TOP w0.254: v2(115.57,53.85) 110.31,48.59 R1_2.1 93.8,48.59 v1(93.34,48.13) 87.63,48.13 81.28,54.48 77.47,54.48 J1_2.1
  BOTTOM w0.254: J2_2.1 76.2,28.45 80.01,32.26 82.55,32.26 84.45,34.16 84.45,44.96 87.63,48.13 v1(93.34,48.13)
-HV_3: length 82.2
  TOP w0.254: v2(181.61,53.85) 176.35,48.59 R1_3.1 159.84,48.59 v1(159.38,48.13) 153.67,48.13 147.32,54.48 143.51,54.48 J1_3.1
  BOTTOM w0.254: J2_3.1 142.24,28.45 146.05,32.26 148.59,32.26 150.5,34.16 150.5,44.96 153.67,48.13 v1(159.38,48.13)
-HV_4: length 82.2
  TOP w0.254: J1_4.1 11.43,120.52 15.24,120.52 21.59,114.17 v1(27.3,114.17) 27.76,114.63 R1_4.1 44.27,114.63 v2(49.53,119.89)
  BOTTOM w0.254: v1(27.3,114.17) 21.59,114.17 18.41,111 18.41,100.2 16.51,98.3 13.97,98.3 10.16,94.49 10.16,88.77
-HV_5: length 82.2
  TOP w0.254: v2(115.57,119.89) 110.31,114.63 R1_5.1 93.8,114.63 v1(93.34,114.17) 87.63,114.17 81.28,120.52 77.47,120.52 J1_5.1
  BOTTOM w0.254: v1(93.34,114.17) 87.63,114.17 84.45,111 84.45,100.2 82.55,98.3 80.01,98.3 76.2,94.49 76.2,88.77
-HV_6: length 82.2
  TOP w0.254: J1_6.1 143.51,120.52 147.32,120.52 153.67,114.17 v1(159.38,114.17) 159.84,114.63 R1_6.1 176.35,114.63 v2(181.61,119.89)
  BOTTOM w0.254: 142.24,88.77 142.24,94.49 146.05,98.3 148.59,98.3 150.5,100.2 150.5,111 153.67,114.17 v1(159.38,114.17)
-HV_7: length 82.2
  TOP w0.254: v2(49.53,185.93) 44.27,180.67 R1_7.1 27.76,180.67 v1(27.3,180.21) 21.59,180.21 15.24,186.56 11.43,186.56 J1_7.1
  BOTTOM w0.254: v1(27.3,180.21) 21.59,180.21 18.41,177.04 18.41,166.24 16.51,164.34 13.97,164.34 10.16,160.53 10.16,154.81
-HV_8: length 82.2
  TOP w0.254: v2(115.57,185.93) 110.31,180.67 R1_8.1 93.8,180.67 v1(93.34,180.21) 87.63,180.21 81.28,186.56 77.47,186.56 J1_8.1
  BOTTOM w0.254: 76.2,154.81 76.2,160.53 80.01,164.34 82.55,164.34 84.45,166.24 84.45,177.04 87.63,180.21 v1(93.34,180.21)
-HV_9: length 82.2
  TOP w0.254: J1_9.1 143.51,186.56 147.32,186.56 153.67,180.21 v1(159.38,180.21) 159.84,180.67 R1_9.1 176.35,180.67 v2(181.61,185.93)
  BOTTOM w0.254: v1(159.38,180.21) 153.67,180.21 150.5,177.04 150.5,166.24 148.59,164.34 146.05,164.34 142.24,160.53 142.24,154.81
ACC_1: length 12.2
  TOP w0.254: R3_1.1 v1(53.34,23.37)
  BOTTOM w0.254: v1(48.9,31.62) 48.9,27.81 v1(53.34,23.37)
ACC_2: length 12.2
  TOP w0.254: R3_2.1 v1(119.38,23.37)
  BOTTOM w0.254: v1(114.94,31.62) 114.94,27.81 v1(119.38,23.37)
ACC_3: length 12.2
  TOP w0.254: R3_3.1 v1(185.42,23.37)
  BOTTOM w0.254: v1(185.42,23.37) 180.97,27.81 v1(180.97,31.62)
ACC_4: length 12.2
  TOP w0.254: R3_4.1 v1(53.34,89.41)
  BOTTOM w0.254: v1(53.34,89.41) 48.9,93.85 v1(48.9,97.66)
ACC_5: length 12.2
  TOP w0.254: R3_5.1 v1(119.38,89.41)
  BOTTOM w0.254: v1(114.94,97.66) 114.94,93.85 v1(119.38,89.41)
ACC_6: length 12.2
  TOP w0.254: R3_6.1 v1(185.42,89.41)
  BOTTOM w0.254: v1(180.97,97.66) 180.97,93.85 v1(185.42,89.41)
ACC_7: length 12.2
  TOP w0.254: R3_7.1 v1(53.34,155.45)
  BOTTOM w0.254: v1(53.34,155.45) 48.9,159.89 v1(48.9,163.7)
ACC_8: length 12.2
  TOP w0.254: R3_8.1 v1(119.38,155.45)
  BOTTOM w0.254: v1(119.38,155.45) 114.94,159.89 v1(114.94,163.7)
ACC_9: length 12.2
  TOP w0.254: R3_9.1 v1(185.42,155.45)
  BOTTOM w0.254: v1(185.42,155.45) 180.97,159.89 v1(180.97,163.7)
UNNAMED_1_CONN14_I18_5_1: length 71.5
  TOP w0.254: J1_1.5 11.43,49.4 16.51,49.4 21.13,44.78 v1(25.22,44.78) R2_1.1 37.15,44.78 37.5,45.14 R1_1.2
  BOTTOM w0.254: v1(25.22,44.78) 20.78,44.78 19.68,43.69 19.68,33.53 17.14,30.99 13.97,30.99 11.43,28.45 11.43,18.92 J2_1.5
UNNAMED_1_CONN14_I18_5_2: length 71.5
  TOP w0.254: J1_2.5 77.47,49.4 82.55,49.4 87.17,44.78 v1(91.26,44.78) R2_2.1 103.19,44.78 103.54,45.14 R1_2.2
  BOTTOM w0.254: J2_2.5 77.47,18.92 77.47,28.45 80.01,30.99 83.19,30.99 85.72,33.53 85.72,43.69 86.82,44.78 v1(91.26,44.78)
UNNAMED_1_CONN14_I18_5_3: length 71.5
  TOP w0.254: J1_3.5 143.51,49.4 148.59,49.4 153.21,44.78 v1(157.3,44.78) R2_3.1 169.23,44.78 169.58,45.14 R1_3.2
  BOTTOM w0.254: v1(157.3,44.78) 152.86,44.78 151.76,43.69 151.76,33.53 149.22,30.99 146.05,30.99 143.51,28.45 143.51,18.92 J2_3.5
UNNAMED_1_CONN14_I18_5_4: length 71.5
  TOP w0.254: R1_4.2 37.5,111.18 37.15,110.82 R2_4.1 v1(25.22,110.82) 21.13,110.82 16.51,115.44 11.43,115.44 J1_4.5
  BOTTOM w0.254: v1(25.22,110.82) 20.78,110.82 19.68,109.73 19.68,99.57 17.14,97.03 13.97,97.03 11.43,94.49 11.43,84.96 10.16,83.69
UNNAMED_1_CONN14_I18_5_5: length 71.5
  TOP w0.254: J1_5.5 77.47,115.44 82.55,115.44 87.17,110.82 v1(91.26,110.82) R2_5.1 103.19,110.82 103.54,111.18 R1_5.2
  BOTTOM w0.254: v1(91.26,110.82) 86.82,110.82 85.72,109.73 85.72,99.57 83.19,97.03 80.01,97.03 77.47,94.49 77.47,84.96 76.2,83.69
UNNAMED_1_CONN14_I18_5_6: length 71.5
  TOP w0.254: R1_6.2 169.58,111.18 169.23,110.82 R2_6.1 v1(157.3,110.82) 153.21,110.82 148.59,115.44 143.51,115.44 J1_6.5
  BOTTOM w0.254: v1(157.3,110.82) 152.86,110.82 151.76,109.73 151.76,99.57 149.22,97.03 146.05,97.03 143.51,94.49 143.51,84.96 142.24,83.69
UNNAMED_1_CONN14_I18_5_7: length 71.5
  TOP w0.254: J1_7.5 11.43,181.48 16.51,181.48 21.13,176.86 v1(25.22,176.86) R2_7.1 37.15,176.86 37.5,177.22 R1_7.2
  BOTTOM w0.254: v1(25.22,176.86) 20.78,176.86 19.68,175.77 19.68,165.61 17.14,163.07 13.97,163.07 11.43,160.53 11.43,151 J2_7.5
UNNAMED_1_CONN14_I18_5_8: length 71.5
  TOP w0.254: J1_8.5 77.47,181.48 82.55,181.48 87.17,176.86 v1(91.26,176.86) R2_8.1 103.19,176.86 103.54,177.22 R1_8.2
  BOTTOM w0.254: J2_8.5 77.47,151 77.47,160.53 80.01,163.07 83.19,163.07 85.72,165.61 85.72,175.77 86.82,176.86 v1(91.26,176.86)
UNNAMED_1_CONN14_I18_5_9: length 71.5
  TOP w0.254: R1_9.2 169.58,177.22 169.23,176.86 R2_9.1 v1(157.3,176.86) 153.21,176.86 148.59,181.48 143.51,181.48 J1_9.5
  BOTTOM w0.254: v1(157.3,176.86) 152.86,176.86 151.76,175.77 151.76,165.61 149.22,163.07 146.05,163.07 143.51,160.53 143.51,151 J2_9.5
UNNAMED_1_CONN14_I18_6_1: length 66.1
  TOP w0.254: J1_1.6 14.61,48.13 21.59,41.15 v1(27.3,41.15) 35.06,41.15 35.24,41.33 R2_1.2 37.15,41.33 37.5,40.97 R4_1.1
  BOTTOM w0.254: J2_1.6 13.97,18.92 13.97,29.08 14.61,29.72 17.78,29.72 20.95,32.89 20.95,39.88 22.23,41.15 v1(27.3,41.15)
UNNAMED_1_CONN14_I18_6_2: length 66.1
  TOP w0.254: R4_2.1 103.54,40.97 103.19,41.33 R2_2.2 101.28,41.33 101.1,41.15 v1(93.34,41.15) 87.63,41.15 80.64,48.13 J1_2.6
  BOTTOM w0.254: J2_2.6 80.01,18.92 80.01,29.08 80.64,29.72 83.82,29.72 87,32.89 87,39.88 88.27,41.15 v1(93.34,41.15)
UNNAMED_1_CONN14_I18_6_3: length 66.1
  TOP w0.254: R4_3.1 169.58,40.97 169.23,41.33 R2_3.2 167.32,41.33 167.14,41.15 v1(159.38,41.15) 153.67,41.15 146.69,48.13 J1_3.6
  BOTTOM w0.254: v1(159.38,41.15) 154.31,41.15 153.03,39.88 153.03,32.89 149.86,29.72 146.69,29.72 146.05,29.08 146.05,18.92 J2_3.6
UNNAMED_1_CONN14_I18_6_4: length 66.1
  TOP w0.254: R4_4.1 37.5,107.01 37.15,107.37 R2_4.2 35.24,107.37 35.06,107.19 v1(27.3,107.19) 21.59,107.19 14.61,114.17 J1_4.6
  BOTTOM w0.254: 12.7,83.69 13.97,84.96 13.97,95.12 14.61,95.76 17.78,95.76 20.95,98.93 20.95,105.92 22.23,107.19 v1(27.3,107.19)
UNNAMED_1_CONN14_I18_6_5: length 66.1
  TOP w0.254: R4_5.1 103.54,107.01 103.19,107.37 R2_5.2 101.28,107.37 101.1,107.19 v1(93.34,107.19) 87.63,107.19 80.64,114.17 J1_5.6
  BOTTOM w0.254: v1(93.34,107.19) 88.27,107.19 87,105.92 87,98.93 83.82,95.76 80.64,95.76 80.01,95.12 80.01,84.96 78.74,83.69
UNNAMED_1_CONN14_I18_6_6: length 66.1
  TOP w0.254: J1_6.6 146.69,114.17 153.67,107.19 v1(159.38,107.19) 167.14,107.19 167.32,107.37 R2_6.2 169.23,107.37 169.58,107.01 R4_6.1
  BOTTOM w0.254: v1(159.38,107.19) 154.31,107.19 153.03,105.92 153.03,98.93 149.86,95.76 146.69,95.76 146.05,95.12 146.05,84.96 144.78,83.69
UNNAMED_1_CONN14_I18_6_7: length 66.1
  TOP w0.254: J1_7.6 14.61,180.21 21.59,173.23 v1(27.3,173.23) 35.06,173.23 35.24,173.41 R2_7.2 37.15,173.41 37.5,173.05 R4_7.1
  BOTTOM w0.254: J2_7.6 13.97,151 13.97,161.16 14.61,161.8 17.78,161.8 20.95,164.97 20.95,171.96 22.23,173.23 v1(27.3,173.23)
UNNAMED_1_CONN14_I18_6_8: length 66.1
  TOP w0.254: J1_8.6 80.64,180.21 87.63,173.23 v1(93.34,173.23) 101.1,173.23 101.28,173.41 R2_8.2 103.19,173.41 103.54,173.05 R4_8.1
  BOTTOM w0.254: v1(93.34,173.23) 88.27,173.23 87,171.96 87,164.97 83.82,161.8 80.64,161.8 80.01,161.16 80.01,151 J2_8.6
UNNAMED_1_CONN14_I18_6_9: length 66.1
  TOP w0.254: R4_9.1 169.58,173.05 169.23,173.41 R2_9.2 167.32,173.41 167.14,173.23 v1(159.38,173.23) 153.67,173.23 146.69,180.21 J1_9.6
  BOTTOM w0.254: v1(159.38,173.23) 154.31,173.23 153.03,171.96 153.03,164.97 149.86,161.8 146.69,161.8 146.05,161.16 146.05,151 J2_9.6
UNNAMED_1_CONN14_I18_7_1: length 68.2
  TOP w0.254: J1_1.7 11.43,46.86 13.34,46.86 23.04,37.16 v1(25.22,37.16) R5_1.1 37.15,37.16 37.5,37.52 R4_1.2
  BOTTOM w0.254: J2_1.7 11.43,16.38 13.97,16.38 15.24,17.65 15.24,27.81 15.88,28.45 18.41,28.45 22.23,32.26 22.23,36.07 23.32,37.16 v1(25.22,37.16)
UNNAMED_1_CONN14_I18_7_2: length 68.2
  TOP w0.254: R4_2.2 103.54,37.52 103.19,37.16 R5_2.1 v1(91.26,37.16) 89.08,37.16 79.38,46.86 77.47,46.86 J1_2.7
  BOTTOM w0.254: v1(91.26,37.16) 89.36,37.16 88.27,36.07 88.27,32.26 84.45,28.45 81.92,28.45 81.28,27.81 81.28,17.65 80.01,16.38 77.47,16.38 J2_2.7
UNNAMED_1_CONN14_I18_7_3: length 68.2
  TOP w0.254: J1_3.7 143.51,46.86 145.41,46.86 155.12,37.16 v1(157.3,37.16) R5_3.1 169.23,37.16 169.58,37.52 R4_3.2
  BOTTOM w0.254: J2_3.7 143.51,16.38 146.05,16.38 147.32,17.65 147.32,27.81 147.96,28.45 150.5,28.45 154.31,32.26 154.31,36.07 155.4,37.16 v1(157.3,37.16)
UNNAMED_1_CONN14_I18_7_4: length 68.2
  TOP w0.254: J1_4.7 11.43,112.9 13.34,112.9 23.04,103.2 v1(25.22,103.2) R5_4.1 37.15,103.2 37.5,103.56 R4_4.2
  BOTTOM w0.254: v1(25.22,103.2) 23.32,103.2 22.23,102.11 22.23,98.3 18.41,94.49 15.88,94.49 15.24,93.85 15.24,83.69 13.97,82.42 11.43,82.42 J2_4.7
UNNAMED_1_CONN14_I18_7_5: length 68.2
  TOP w0.254: J1_5.7 77.47,112.9 79.38,112.9 89.08,103.2 v1(91.26,103.2) R5_5.1 103.19,103.2 103.54,103.56 R4_5.2
  BOTTOM w0.254: v1(91.26,103.2) 89.36,103.2 88.27,102.11 88.27,98.3 84.45,94.49 81.92,94.49 81.28,93.85 81.28,83.69 80.01,82.42 77.47,82.42 J2_5.7
UNNAMED_1_CONN14_I18_7_6: length 68.2
  TOP w0.254: J1_6.7 143.51,112.9 145.41,112.9 155.12,103.2 v1(157.3,103.2) R5_6.1 169.23,103.2 169.58,103.56 R4_6.2
  BOTTOM w0.254: v1(157.3,103.2) 155.4,103.2 154.31,102.11 154.31,98.3 150.5,94.49 147.96,94.49 147.32,93.85 147.32,83.69 146.05,82.42 143.51,82.42 J2_6.7
UNNAMED_1_CONN14_I18_7_7: length 68.2
  TOP w0.254: R4_7.2 37.5,169.6 37.15,169.24 R5_7.1 v1(25.22,169.24) 23.04,169.24 13.34,178.94 11.43,178.94 J1_7.7
  BOTTOM w0.254: J2_7.7 11.43,148.46 13.97,148.46 15.24,149.73 15.24,159.89 15.88,160.53 18.41,160.53 22.23,164.34 22.23,168.15 23.32,169.24 v1(25.22,169.24)
UNNAMED_1_CONN14_I18_7_8: length 68.2
  TOP w0.254: J1_8.7 77.47,178.94 79.38,178.94 89.08,169.24 v1(91.26,169.24) R5_8.1 103.19,169.24 103.54,169.6 R4_8.2
  BOTTOM w0.254: v1(91.26,169.24) 89.36,169.24 88.27,168.15 88.27,164.34 84.45,160.53 81.92,160.53 81.28,159.89 81.28,149.73 80.01,148.46 77.47,148.46 J2_8.7
UNNAMED_1_CONN14_I18_7_9: length 68.2
  TOP w0.254: J1_9.7 143.51,178.94 145.41,178.94 155.12,169.24 v1(157.3,169.24) R5_9.1 169.23,169.24 169.58,169.6 R4_9.2
  BOTTOM w0.254: v1(157.3,169.24) 155.4,169.24 154.31,168.15 154.31,164.34 150.5,160.53 147.96,160.53 147.32,159.89 147.32,149.73 146.05,148.46 143.51,148.46 J2_9.7
UNNAMED_1_CONN14_I18_8_1: length 62.9
  TOP w0.254: J1_1.8 12.7,44.58 12.95,44.32 13.34,44.32 24.13,33.53 v1(27.3,33.53) 35.06,33.53 35.24,33.71 R5_1.2 37.15,33.71 37.5,33.35 R6_1.1
  BOTTOM w0.254: J2_1.8 15.24,15.11 17.14,17.02 17.14,26.54 17.78,27.18 19.05,27.18 23.5,31.62 23.5,32.89 24.13,33.53 v1(27.3,33.53)
UNNAMED_1_CONN14_I18_8_2: length 62.9
  TOP w0.254: J1_2.8 78.74,44.58 78.99,44.32 79.38,44.32 90.17,33.53 v1(93.34,33.53) 101.1,33.53 101.28,33.71 R5_2.2 103.19,33.71 103.54,33.35 R6_2.1
  BOTTOM w0.254: v1(93.34,33.53) 90.17,33.53 89.53,32.89 89.53,31.62 85.09,27.18 83.82,27.18 83.19,26.54 83.19,17.02 81.28,15.11 J2_2.8
UNNAMED_1_CONN14_I18_8_3: length 62.9
  TOP w0.254: J1_3.8 144.78,44.58 145.03,44.32 145.41,44.32 156.21,33.53 v1(159.38,33.53) 167.14,33.53 167.32,33.71 R5_3.2 169.23,33.71 169.58,33.35 R6_3.1
  BOTTOM w0.254: J2_3.8 147.32,15.11 149.22,17.02 149.22,26.54 149.86,27.18 151.13,27.18 155.57,31.62 155.57,32.89 156.21,33.53 v1(159.38,33.53)
UNNAMED_1_CONN14_I18_8_4: length 62.9
  TOP w0.254: R6_4.1 37.5,99.39 37.15,99.75 R5_4.2 35.24,99.75 35.06,99.57 v1(27.3,99.57) 24.13,99.57 13.34,110.36 12.95,110.36 12.7,110.62 J1_4.8
  BOTTOM w0.254: J2_4.8 15.24,81.15 17.14,83.06 17.14,92.58 17.78,93.22 19.05,93.22 23.5,97.66 23.5,98.93 24.13,99.57 v1(27.3,99.57)
UNNAMED_1_CONN14_I18_8_5: length 62.9
  TOP w0.254: J1_5.8 78.74,110.62 78.99,110.36 79.38,110.36 90.17,99.57 v1(93.34,99.57) 101.1,99.57 101.28,99.75 R5_5.2 103.19,99.75 103.54,99.39 R6_5.1
  BOTTOM w0.254: v1(93.34,99.57) 90.17,99.57 89.53,98.93 89.53,97.66 85.09,93.22 83.82,93.22 83.19,92.58 83.19,83.06 81.28,81.15 J2_5.8
UNNAMED_1_CONN14_I18_8_6: length 62.9
  TOP w0.254: J1_6.8 144.78,110.62 145.03,110.36 145.41,110.36 156.21,99.57 v1(159.38,99.57) 167.14,99.57 167.32,99.75 R5_6.2 169.23,99.75 169.58,99.39 R6_6.1
  BOTTOM w0.254: v1(159.38,99.57) 156.21,99.57 155.57,98.93 155.57,97.66 151.13,93.22 149.86,93.22 149.22,92.58 149.22,83.06 147.32,81.15 J2_6.8
UNNAMED_1_CONN14_I18_8_7: length 62.9
  TOP w0.254: R6_7.1 37.5,165.43 37.15,165.79 R5_7.2 35.24,165.79 35.06,165.61 v1(27.3,165.61) 24.13,165.61 13.34,176.4 12.95,176.4 12.7,176.66 J1_7.8
  BOTTOM w0.254: v1(27.3,165.61) 24.13,165.61 23.5,164.97 23.5,163.7 19.05,159.26 17.78,159.26 17.14,158.62 17.14,149.1 15.24,147.19 J2_7.8
UNNAMED_1_CONN14_I18_8_8: length 62.9
  TOP w0.254: R6_8.1 103.54,165.43 103.19,165.79 R5_8.2 101.28,165.79 101.1,165.61 v1(93.34,165.61) 90.17,165.61 79.38,176.4 78.99,176.4 78.74,176.66 J1_8.8
  BOTTOM w0.254: J2_8.8 81.28,147.19 83.19,149.1 83.19,158.62 83.82,159.26 85.09,159.26 89.53,163.7 89.53,164.97 90.17,165.61 v1(93.34,165.61)
UNNAMED_1_CONN14_I18_8_9: length 62.9
  TOP w0.254: R6_9.1 169.58,165.43 169.23,165.79 R5_9.2 167.32,165.79 167.14,165.61 v1(159.38,165.61) 156.21,165.61 145.41,176.4 145.03,176.4 144.78,176.66 J1_9.8
  BOTTOM w0.254: J2_9.8 147.32,147.19 149.22,149.1 149.22,158.62 149.86,159.26 151.13,159.26 155.57,163.7 155.57,164.97 156.21,165.61 v1(159.38,165.61)
UNNAMED_1_CONN14_I18_9_1: length 65.2
  TOP w0.254: R6_1.2 37.5,29.9 37.15,29.54 R7_1.1 35.24,29.54 35.06,29.72 v1(25.4,29.72) 13.34,41.78 11.43,41.78 10.16,43.05
  BOTTOM w0.254: v1(25.4,29.72) 24.13,29.72 20.32,25.91 19.05,25.91 18.41,25.27 18.41,15.11 17.14,13.84 11.43,13.84 J2_1.9
UNNAMED_1_CONN14_I18_9_2: length 65.2
  TOP w0.254: 76.2,43.05 77.47,41.78 79.38,41.78 v1(91.44,29.72) 101.1,29.72 101.28,29.54 R7_2.1 103.19,29.54 103.54,29.9 R6_2.2
  BOTTOM w0.254: J2_2.9 77.47,13.84 83.19,13.84 84.45,15.11 84.45,25.27 85.09,25.91 86.36,25.91 90.17,29.72 v1(91.44,29.72)
UNNAMED_1_CONN14_I18_9_3: length 65.2
  TOP w0.254: R6_3.2 169.58,29.9 169.23,29.54 R7_3.1 167.32,29.54 167.14,29.72 v1(157.48,29.72) 145.41,41.78 143.51,41.78 142.24,43.05
  BOTTOM w0.254: v1(157.48,29.72) 156.21,29.72 152.4,25.91 151.13,25.91 150.5,25.27 150.5,15.11 149.22,13.84 143.51,13.84 J2_3.9
UNNAMED_1_CONN14_I18_9_4: length 65.2
  TOP w0.254: R6_4.2 37.5,95.94 37.15,95.58 R7_4.1 35.24,95.58 35.06,95.76 v1(25.4,95.76) 13.34,107.82 11.43,107.82 J1_4.9
  BOTTOM w0.254: v1(25.4,95.76) 24.13,95.76 20.32,91.95 19.05,91.95 18.41,91.31 18.41,81.15 17.14,79.88 11.43,79.88 J2_4.9
UNNAMED_1_CONN14_I18_9_5: length 65.2
  TOP w0.254: R6_5.2 103.54,95.94 103.19,95.58 R7_5.1 101.28,95.58 101.1,95.76 v1(91.44,95.76) 79.38,107.82 77.47,107.82 J1_5.9
  BOTTOM w0.254: J2_5.9 77.47,79.88 83.19,79.88 84.45,81.15 84.45,91.31 85.09,91.95 86.36,91.95 90.17,95.76 v1(91.44,95.76)
UNNAMED_1_CONN14_I18_9_6: length 65.2
  TOP w0.254: J1_6.9 143.51,107.82 145.41,107.82 v1(157.48,95.76) 167.14,95.76 167.32,95.58 R7_6.1 169.23,95.58 169.58,95.94 R6_6.2
  BOTTOM w0.254: v1(157.48,95.76) 156.21,95.76 152.4,91.95 151.13,91.95 150.5,91.31 150.5,81.15 149.22,79.88 143.51,79.88 J2_6.9
UNNAMED_1_CONN14_I18_9_7: length 65.2
  TOP w0.254: J1_7.9 11.43,173.86 13.34,173.86 v1(25.4,161.8) 35.06,161.8 35.24,161.62 R7_7.1 37.15,161.62 37.5,161.98 R6_7.2
  BOTTOM w0.254: 10.16,144.65 11.43,145.92 17.14,145.92 18.41,147.19 18.41,157.35 19.05,157.99 20.32,157.99 24.13,161.8 v1(25.4,161.8)
UNNAMED_1_CONN14_I18_9_8: length 65.2
  TOP w0.254: R6_8.2 103.54,161.98 103.19,161.62 R7_8.1 101.28,161.62 101.1,161.8 v1(91.44,161.8) 79.38,173.86 77.47,173.86 J1_8.9
  BOTTOM w0.254: 76.2,144.65 77.47,145.92 83.19,145.92 84.45,147.19 84.45,157.35 85.09,157.99 86.36,157.99 90.17,161.8 v1(91.44,161.8)
UNNAMED_1_CONN14_I18_9_9: length 65.2
  TOP w0.254: R6_9.2 169.58,161.98 169.23,161.62 R7_9.1 167.32,161.62 167.14,161.8 v1(157.48,161.8) 145.41,173.86 143.51,173.86 J1_9.9
  BOTTOM w0.254: v1(157.48,161.8) 156.21,161.8 152.4,157.99 151.13,157.99 150.5,157.35 150.5,147.19 149.22,145.92 143.51,145.92 142.24,144.65
UNNAMED_1_CONN14_I18_10_1: length 72.8
  TOP w0.254: R8_1.1 37.5,25.73 37.15,26.09 R7_1.2 v1(27.48,26.09) 26.21,26.09 J2_1.10 11.43,13.84 9.53,13.84 v1(8.26,15.11)
  BOTTOM w0.254: 12.7,43.05 16.51,39.24 16.51,37.34 8.26,29.08 v1(8.26,15.11)
UNNAMED_1_CONN14_I18_10_2: length 72.8
  TOP w0.254: R8_2.1 103.54,25.73 103.19,26.09 R7_2.2 v1(93.52,26.09) 92.25,26.09 J2_2.10 77.47,13.84 75.56,13.84 v1(74.3,15.11)
  BOTTOM w0.254: v1(74.3,15.11) 74.3,29.08 82.55,37.34 82.55,39.24 78.74,43.05
UNNAMED_1_CONN14_I18_10_3: length 72.8
  TOP w0.254: R8_3.1 169.58,25.73 169.23,26.09 R7_3.2 v1(159.56,26.09) 158.29,26.09 J2_3.10 143.51,13.84 141.6,13.84 v1(140.34,15.11)
  BOTTOM w0.254: 144.78,43.05 148.59,39.24 148.59,37.34 140.34,29.08 v1(140.34,15.11)
UNNAMED_1_CONN14_I18_10_4: length 72.8
  TOP w0.254: v1(8.26,81.15) 9.53,79.88 11.43,79.88 J2_4.10 26.21,92.13 v1(27.48,92.13) R7_4.2 37.15,92.13 37.5,91.77 R8_4.1
  BOTTOM w0.254: J1_4.10 16.51,105.28 16.51,103.38 8.26,95.12 v1(8.26,81.15)
UNNAMED_1_CONN14_I18_10_5: length 72.8
  TOP w0.254: R8_5.1 103.54,91.77 103.19,92.13 R7_5.2 v1(93.52,92.13) 92.25,92.13 J2_5.10 77.47,79.88 75.56,79.88 v1(74.3,81.15)
  BOTTOM w0.254: J1_5.10 82.55,105.28 82.55,103.38 74.3,95.12 v1(74.3,81.15)
UNNAMED_1_CONN14_I18_10_6: length 72.8
  TOP w0.254: v1(140.34,81.15) 141.6,79.88 143.51,79.88 J2_6.10 158.29,92.13 v1(159.56,92.13) R7_6.2 169.23,92.13 169.58,91.77 R8_6.1
  BOTTOM w0.254: J1_6.10 148.59,105.28 148.59,103.38 140.34,95.12 v1(140.34,81.15)
UNNAMED_1_CONN14_I18_10_7: length 72.8
  TOP w0.254: v1(8.26,147.19) 9.53,145.92 11.43,145.92 12.7,144.65 26.21,158.17 v1(27.48,158.17) R7_7.2 37.15,158.17 37.5,157.81 R8_7.1
  BOTTOM w0.254: J1_7.10 16.51,171.32 16.51,169.42 8.26,161.16 v1(8.26,147.19)
UNNAMED_1_CONN14_I18_10_8: length 72.8
  TOP w0.254: v1(74.3,147.19) 75.56,145.92 77.47,145.92 78.74,144.65 92.25,158.17 v1(93.52,158.17) R7_8.2 103.19,158.17 103.54,157.81 R8_8.1
  BOTTOM w0.254: v1(74.3,147.19) 74.3,161.16 82.55,169.42 82.55,171.32 J1_8.10
UNNAMED_1_CONN14_I18_10_9: length 72.8
  TOP w0.254: R8_9.1 169.58,157.81 169.23,158.17 R7_9.2 v1(159.56,158.17) 158.29,158.17 144.78,144.65 143.51,145.92 141.6,145.92 v1(140.34,147.19)
  BOTTOM w0.254: v1(140.34,147.19) 140.34,161.16 148.59,169.42 148.59,171.32 J1_9.10
UNNAMED_1_CONN14_I18_11_1: length 65.7
  TOP w0.254: J2_1.11 11.43,11.3 14.61,11.3 v1(25.4,22.1) R9_1.2 ; v1(2.54,16.38) 2.54,38.61 4.45,40.51 10.16,40.51
  BOTTOM w0.254: J2_1.11 8.89,10.03 v1(2.54,16.38)
UNNAMED_1_CONN14_I18_11_2: length 65.7
  TOP w0.254: R9_2.2 v1(91.44,22.1) 80.64,11.3 77.47,11.3 J2_2.11 ; 76.2,40.51 70.48,40.51 68.58,38.61 v1(68.58,16.38)
  BOTTOM w0.254: v1(68.58,16.38) 74.93,10.03 J2_2.11
UNNAMED_1_CONN14_I18_11_3: length 65.7
  TOP w0.254: J2_3.11 143.51,11.3 146.69,11.3 v1(157.48,22.1) R9_3.2 ; v1(134.62,16.38) 134.62,38.61 136.53,40.51 142.24,40.51
  BOTTOM w0.254: v1(134.62,16.38) 140.97,10.03 J2_3.11
UNNAMED_1_CONN14_I18_11_4: length 65.7
  TOP w0.254: 10.16,76.07 11.43,77.34 14.61,77.34 v1(25.4,88.14) R9_4.2 ; v1(2.54,82.42) 2.54,104.65 4.45,106.55 J1_4.11
  BOTTOM w0.254: 10.16,76.07 8.89,76.07 v1(2.54,82.42)
UNNAMED_1_CONN14_I18_11_5: length 65.7
  TOP w0.254: v1(68.58,82.42) 68.58,104.65 70.48,106.55 J1_5.11 ; R9_5.2 v1(91.44,88.14) 80.64,77.34 77.47,77.34 76.2,76.07
  BOTTOM w0.254: v1(68.58,82.42) 74.93,76.07 76.2,76.07
UNNAMED_1_CONN14_I18_11_6: length 65.7
  TOP w0.254: v1(134.62,82.42) 134.62,104.65 136.53,106.55 J1_6.11 ; R9_6.2 v1(157.48,88.14) 146.69,77.34 143.51,77.34 142.24,76.07
  BOTTOM w0.254: v1(134.62,82.42) 140.97,76.07 142.24,76.07
UNNAMED_1_CONN14_I18_11_7: length 65.7
  TOP w0.254: R9_7.2 v1(25.4,154.18) 14.61,143.38 11.43,143.38 J2_7.11 ; J1_7.11 4.45,172.59 2.54,170.69 v1(2.54,148.46)
  BOTTOM w0.254: J2_7.11 8.89,142.11 v1(2.54,148.46)
UNNAMED_1_CONN14_I18_11_8: length 65.7
  TOP w0.254: R9_8.2 v1(91.44,154.18) 80.64,143.38 77.47,143.38 J2_8.11 ; v1(68.58,148.46) 68.58,170.69 70.48,172.59 J1_8.11
  BOTTOM w0.254: v1(68.58,148.46) 74.93,142.11 J2_8.11
UNNAMED_1_CONN14_I18_11_9: length 65.7
  TOP w0.254: R9_9.2 v1(157.48,154.18) 146.69,143.38 143.51,143.38 J2_9.11 ; J1_9.11 136.53,172.59 134.62,170.69 v1(134.62,148.46)
  BOTTOM w0.254: v1(134.62,148.46) 140.97,142.11 J2_9.11
UNNAMED_1_CONN14_I18_12_1: length 86.3
  TOP w0.254: R3_1.2 45.72,23.37 42.55,20.19 31.23,20.19 30.02,18.99 R11_1.2 v1(27.3,18.92) 25.4,18.92 16.51,10.03 J2_1.12 ; 12.7,40.51 11.43,39.24 5.08,39.24 3.81,37.97 v1(3.81,13.84)
  BOTTOM w0.254: J2_1.12 11.43,8.76 8.89,8.76 v1(3.81,13.84)
UNNAMED_1_CONN14_I18_12_2: length 86.3
  TOP w0.254: v1(69.85,13.84) 69.85,37.97 71.12,39.24 77.47,39.24 78.74,40.51 ; R3_2.2 111.76,23.37 108.58,20.19 97.27,20.19 96.06,18.99 R11_2.2 v1(93.34,18.92) 91.44,18.92 82.55,10.03 J2_2.12
  BOTTOM w0.254: J2_2.12 77.47,8.76 74.93,8.76 v1(69.85,13.84)
UNNAMED_1_CONN14_I18_12_3: length 86.3
  TOP w0.254: R3_3.2 177.8,23.37 174.62,20.19 163.31,20.19 162.1,18.99 R11_3.2 v1(159.38,18.92) 157.48,18.92 148.59,10.03 J2_3.12 ; v1(135.89,13.84) 135.89,37.97 137.16,39.24 143.51,39.24 144.78,40.51
  BOTTOM w0.254: J2_3.12 143.51,8.76 140.97,8.76 v1(135.89,13.84)
UNNAMED_1_CONN14_I18_12_4: length 86.3
  TOP w0.254: J1_4.12 11.43,105.28 5.08,105.28 3.81,104.01 v1(3.81,79.88) ; R3_4.2 45.72,89.41 42.55,86.23 31.23,86.23 30.02,85.03 R11_4.2 v1(27.3,84.96) 25.4,84.96 16.51,76.07 12.7,76.07
  BOTTOM w0.254: 12.7,76.07 11.43,74.8 8.89,74.8 v1(3.81,79.88)
UNNAMED_1_CONN14_I18_12_5: length 86.3
  TOP w0.254: 78.74,76.07 82.55,76.07 91.44,84.96 v1(93.34,84.96) R11_5.2 96.06,85.03 97.27,86.23 108.58,86.23 111.76,89.41 R3_5.2 ; v1(69.85,79.88) 69.85,104.01 71.12,105.28 77.47,105.28 J1_5.12
  BOTTOM w0.254: 78.74,76.07 77.47,74.8 74.93,74.8 v1(69.85,79.88)
UNNAMED_1_CONN14_I18_12_6: length 86.3
  TOP w0.254: v1(135.89,79.88) 135.89,104.01 137.16,105.28 143.51,105.28 J1_6.12 ; R3_6.2 177.8,89.41 174.62,86.23 163.31,86.23 162.1,85.03 R11_6.2 v1(159.38,84.96) 157.48,84.96 148.59,76.07 144.78,76.07
  BOTTOM w0.254: v1(135.89,79.88) 140.97,74.8 143.51,74.8 144.78,76.07
UNNAMED_1_CONN14_I18_12_7: length 86.3
  TOP w0.254: v1(3.81,145.92) 3.81,170.05 5.08,171.32 11.43,171.32 J1_7.12 ; R3_7.2 45.72,155.45 42.55,152.27 31.23,152.27 30.02,151.07 R11_7.2 v1(27.3,151) 25.4,151 16.51,142.11 J2_7.12
  BOTTOM w0.254: v1(3.81,145.92) 8.89,140.84 11.43,140.84 J2_7.12
UNNAMED_1_CONN14_I18_12_8: length 86.3
  TOP w0.254: J2_8.12 82.55,142.11 91.44,151 v1(93.34,151) R11_8.2 96.06,151.07 97.27,152.27 108.58,152.27 111.76,155.45 R3_8.2 ; J1_8.12 77.47,171.32 71.12,171.32 69.85,170.05 v1(69.85,145.92)
  BOTTOM w0.254: v1(69.85,145.92) 74.93,140.84 77.47,140.84 J2_8.12
UNNAMED_1_CONN14_I18_12_9: length 86.3
  TOP w0.254: J2_9.12 148.59,142.11 157.48,151 v1(159.38,151) R11_9.2 162.1,151.07 163.31,152.27 174.62,152.27 177.8,155.45 R3_9.2 ; J1_9.12 143.51,171.32 137.16,171.32 135.89,170.05 v1(135.89,145.92)
  BOTTOM w0.254: v1(135.89,145.92) 140.97,140.84 143.51,140.84 J2_9.12
UNNAMED_1_CONN14_I18_13_1: length 61.7
  TOP w0.254: v1(5.08,10.67) 5.08,37.34 5.71,37.97 10.16,37.97 ; J2_1.13 11.43,8.76 18.41,8.76 v1(25.4,15.75) R13_1.2
  BOTTOM w0.254: J2_1.13 8.26,7.49 v1(5.08,10.67)
UNNAMED_1_CONN14_I18_13_2: length 61.7
  TOP w0.254: R13_2.2 v1(91.44,15.75) 84.45,8.76 77.47,8.76 J2_2.13 ; 76.2,37.97 71.75,37.97 71.12,37.34 v1(71.12,10.67)
  BOTTOM w0.254: v1(71.12,10.67) 74.3,7.49 J2_2.13
UNNAMED_1_CONN14_I18_13_3: length 61.7
  TOP w0.254: 142.24,37.97 137.79,37.97 137.16,37.34 v1(137.16,10.67) ; J2_3.13 143.51,8.76 150.5,8.76 v1(157.48,15.75) R13_3.2
  BOTTOM w0.254: J2_3.13 140.34,7.49 v1(137.16,10.67)
UNNAMED_1_CONN14_I18_13_4: length 61.7
  TOP w0.254: R13_4.2 v1(25.4,81.79) 18.41,74.8 11.43,74.8 J2_4.13 ; v1(5.08,76.71) 5.08,103.38 5.71,104.01 J1_4.13
  BOTTOM w0.254: J2_4.13 8.26,73.53 v1(5.08,76.71)
UNNAMED_1_CONN14_I18_13_5: length 61.7
  TOP w0.254: v1(71.12,76.71) 71.12,103.38 71.75,104.01 J1_5.13 ; R13_5.2 v1(91.44,81.79) 84.45,74.8 77.47,74.8 J2_5.13
  BOTTOM w0.254: J2_5.13 74.3,73.53 v1(71.12,76.71)
UNNAMED_1_CONN14_I18_13_6: length 61.7
  TOP w0.254: J2_6.13 143.51,74.8 150.5,74.8 v1(157.48,81.79) R13_6.2 ; J1_6.13 137.79,104.01 137.16,103.38 v1(137.16,76.71)
  BOTTOM w0.254: v1(137.16,76.71) 140.34,73.53 J2_6.13
UNNAMED_1_CONN14_I18_13_7: length 61.7
  TOP w0.254: v1(5.08,142.75) 5.08,169.42 5.71,170.05 J1_7.13 ; J2_7.13 11.43,140.84 18.41,140.84 v1(25.4,147.83) R13_7.2
  BOTTOM w0.254: v1(5.08,142.75) 8.26,139.57 J2_7.13
UNNAMED_1_CONN14_I18_13_8: length 61.7
  TOP w0.254: R13_8.2 v1(91.44,147.83) 84.45,140.84 77.47,140.84 J2_8.13 ; v1(71.12,142.75) 71.12,169.42 71.75,170.05 J1_8.13
  BOTTOM w0.254: v1(71.12,142.75) 74.3,139.57 J2_8.13
UNNAMED_1_CONN14_I18_13_9: length 61.7
  TOP w0.254: R13_9.2 v1(157.48,147.83) 150.5,140.84 143.51,140.84 J2_9.13 ; J1_9.13 137.79,170.05 137.16,169.42 v1(137.16,142.75)
  BOTTOM w0.254: v1(137.16,142.75) 140.34,139.57 J2_9.13
UNNAMED_1_CSMD1210_I15_A_1: length 31.6
  TOP w0.254: R9_1.1 35.06,22.1 35.24,21.92 R10_1.1 39.97,21.92 40.32,22.28 R8_1.2 42.72,22.28 46.35,25.91 53.34,25.91 54.61,24.64 54.61,20.19 53.98,19.56 C1_1.1
UNNAMED_1_CSMD1210_I15_A_2: length 31.6
  TOP w0.254: C1_2.1 120.02,19.56 120.65,20.19 120.65,24.64 119.38,25.91 112.39,25.91 108.76,22.28 R8_2.2 106.36,22.28 106.01,21.92 R10_2.1 101.28,21.92 101.1,22.1 R9_2.1
